# Altium PCB OK335xD V2.4 20160121.PcbDoc (part 1 of 4)
Units mm, origin at the board's own origin, x right, y up, seen from the top; angles counter-clockwise.
Board outline 190 x 130 mm, 4 copper layers (Top Layer, GND, POWER, Bottom Layer); 326 components, 332 nets, 1399 pads, 799 vias.
Unrouted connection lines stored in the file: 413.
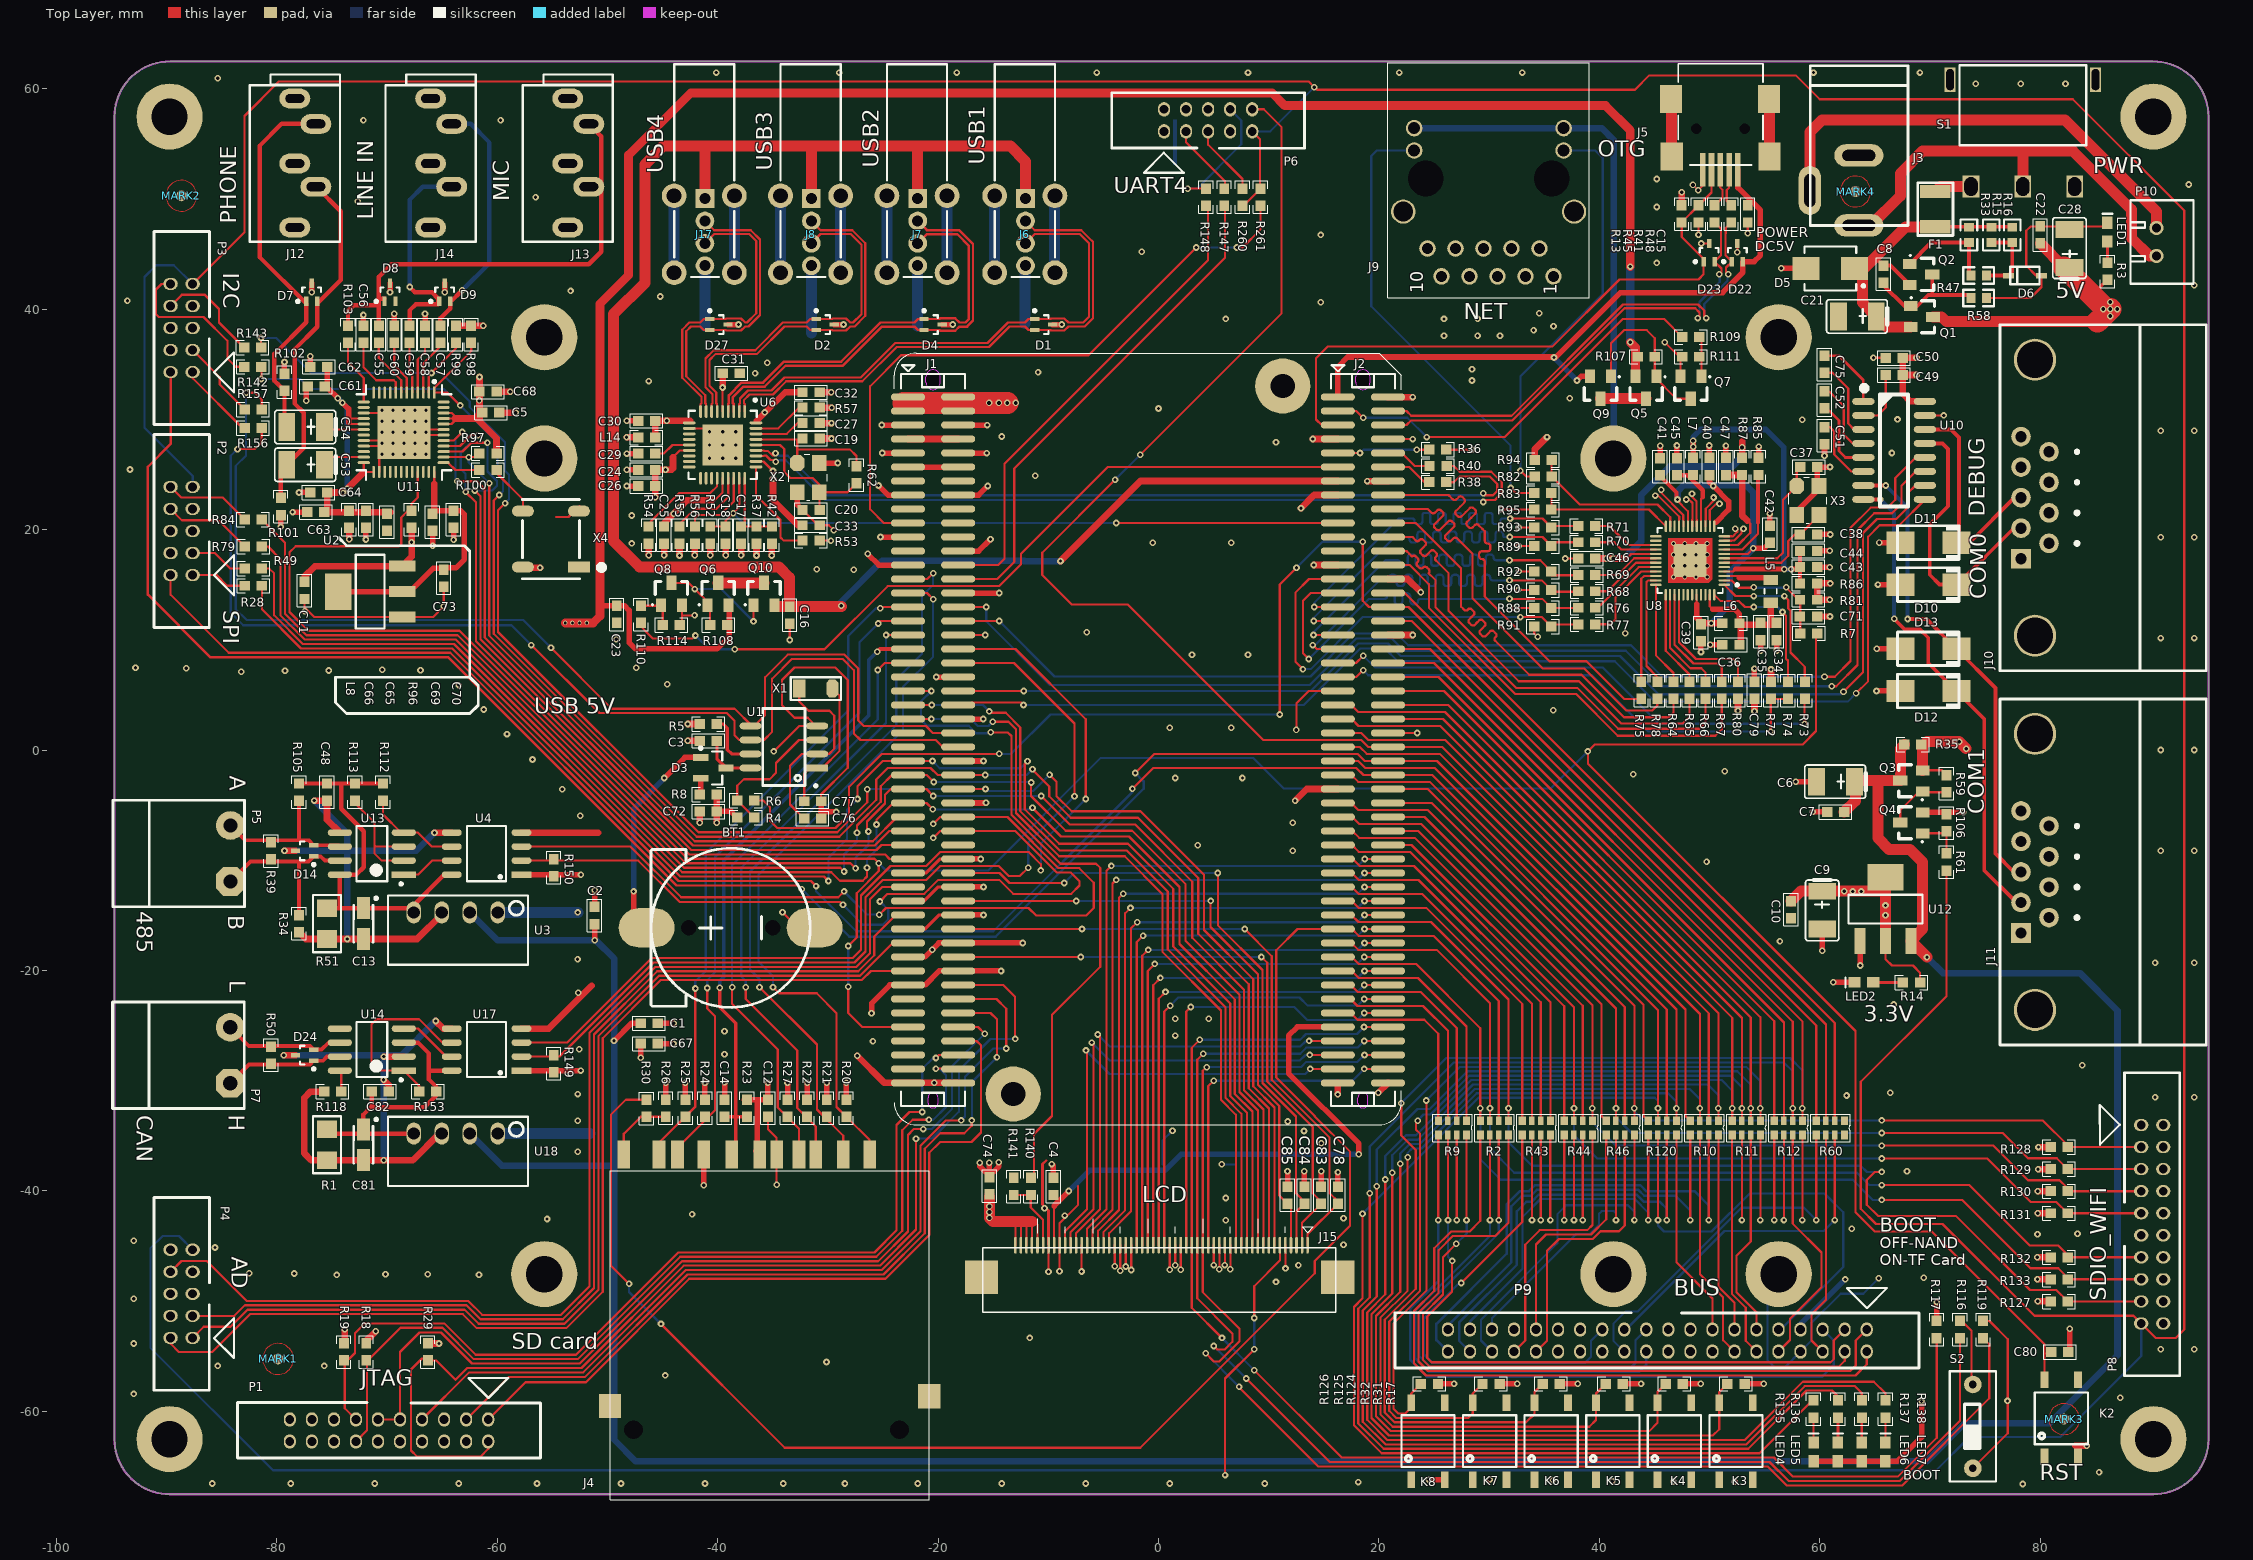
[diagram p0: Top Layer view]
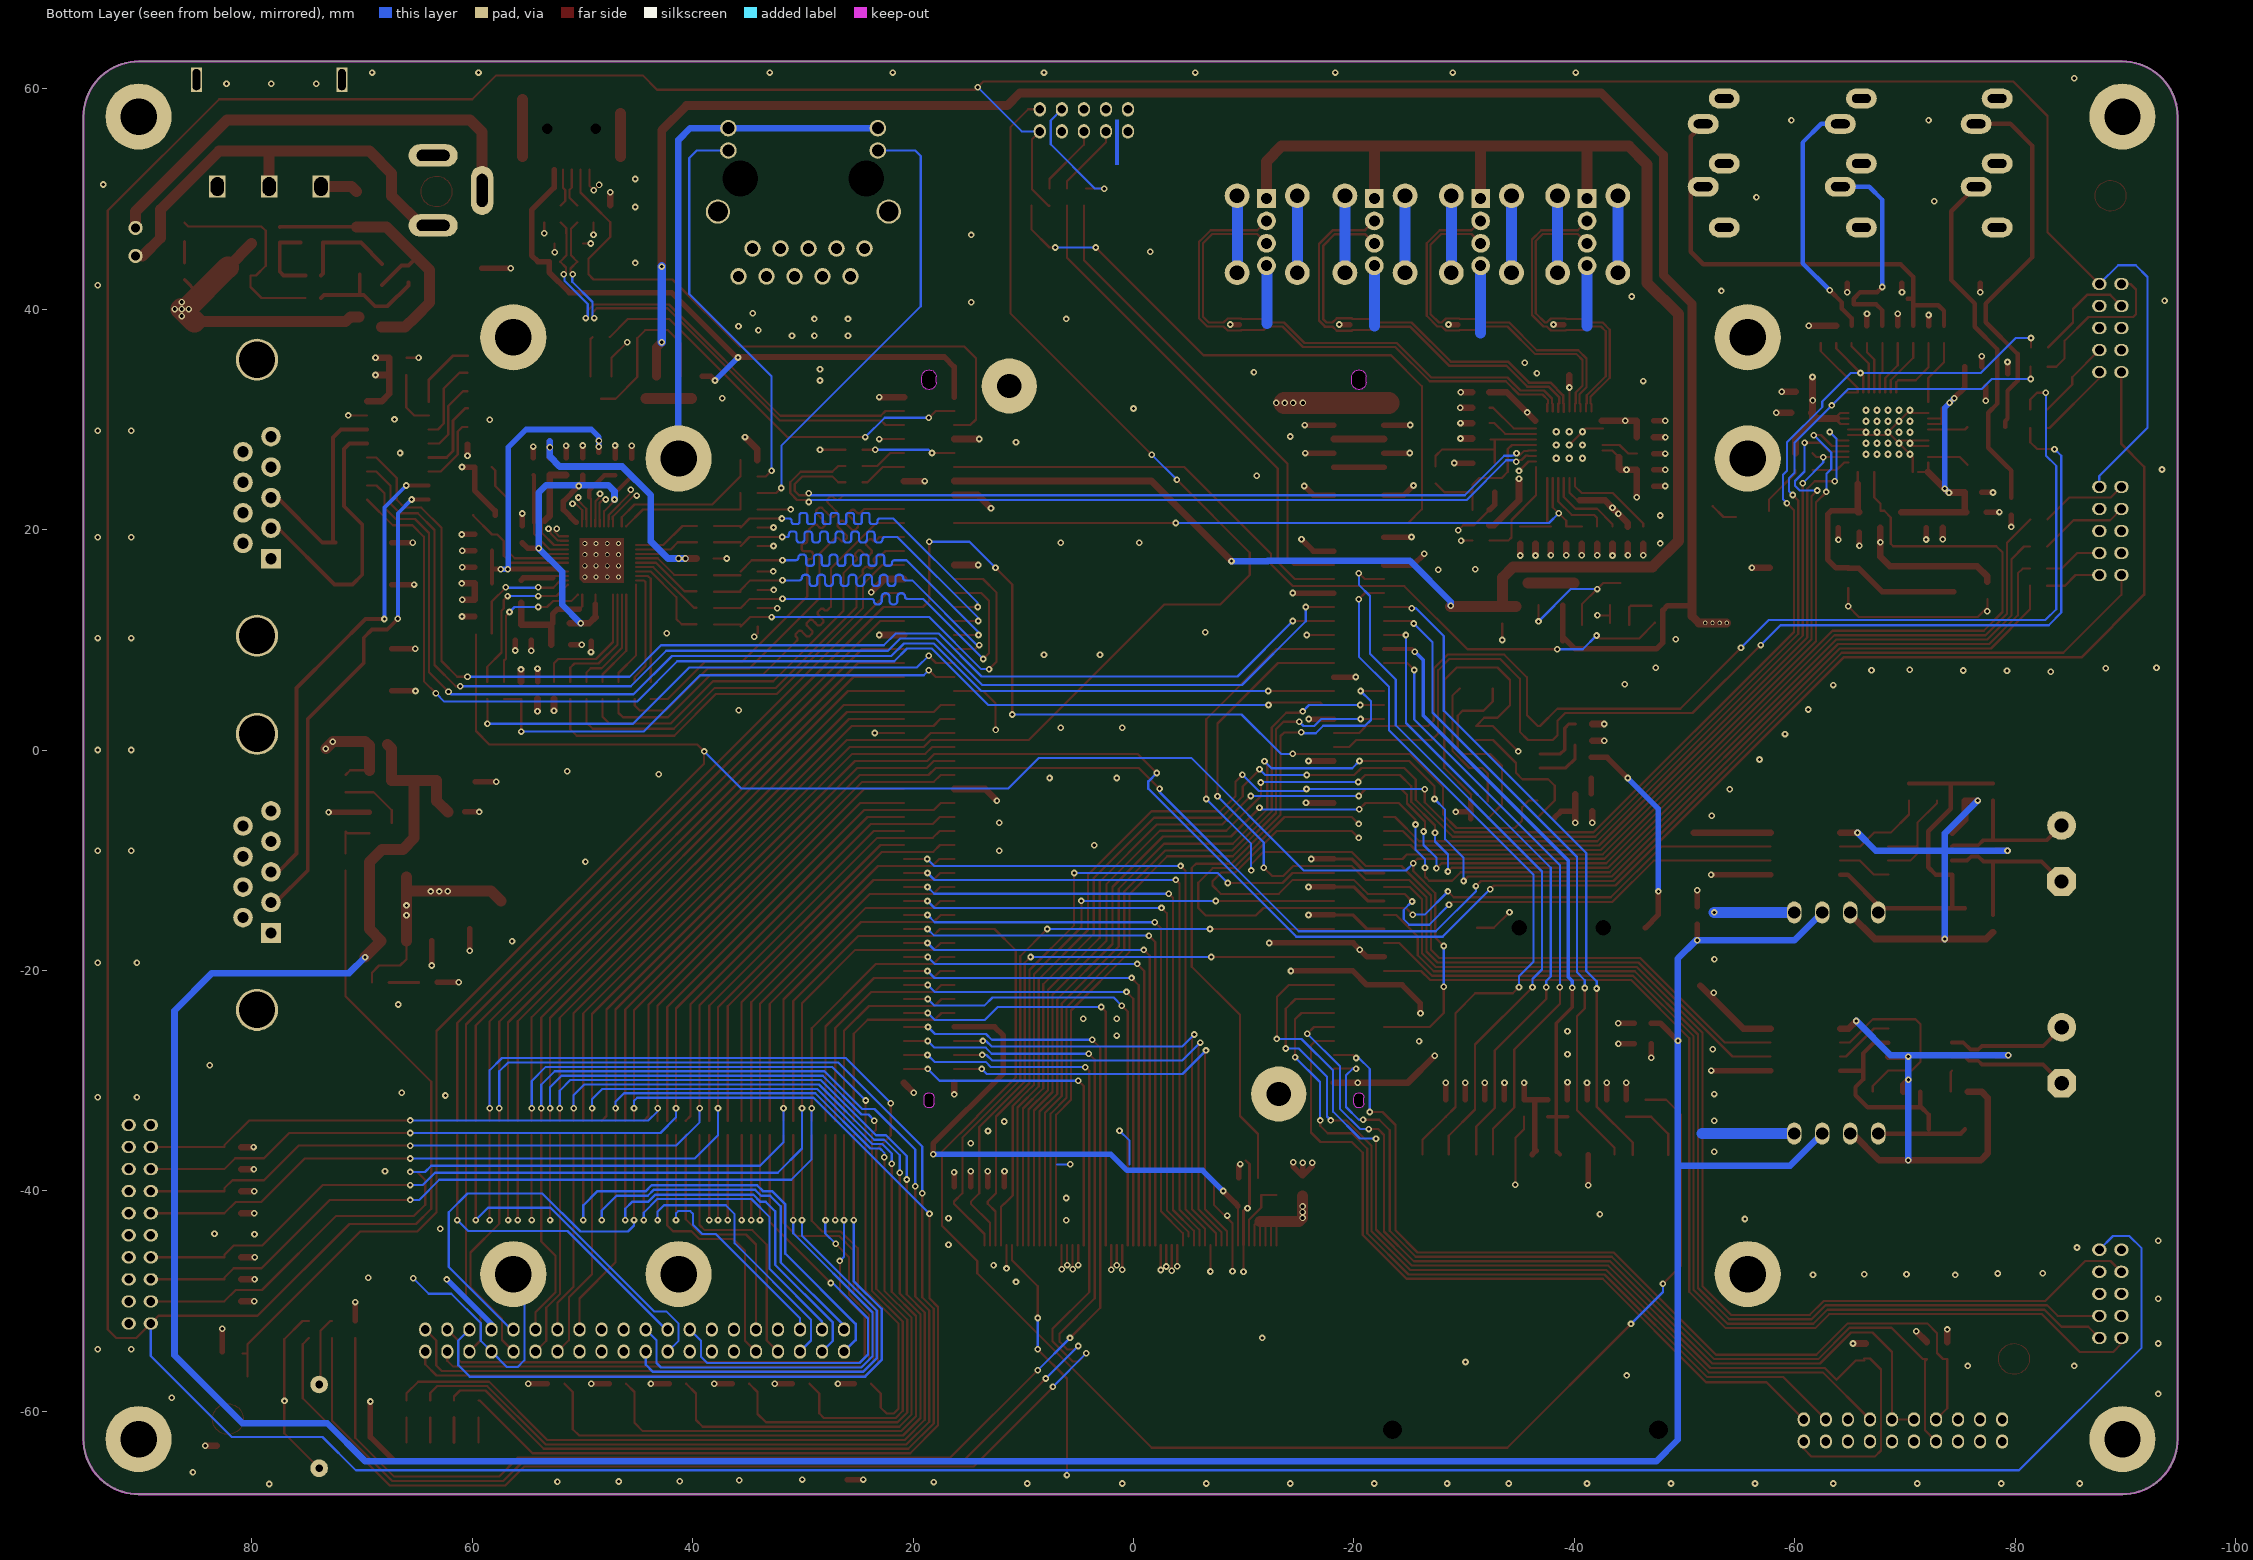
[diagram p1: Bottom Layer view, seen from below]
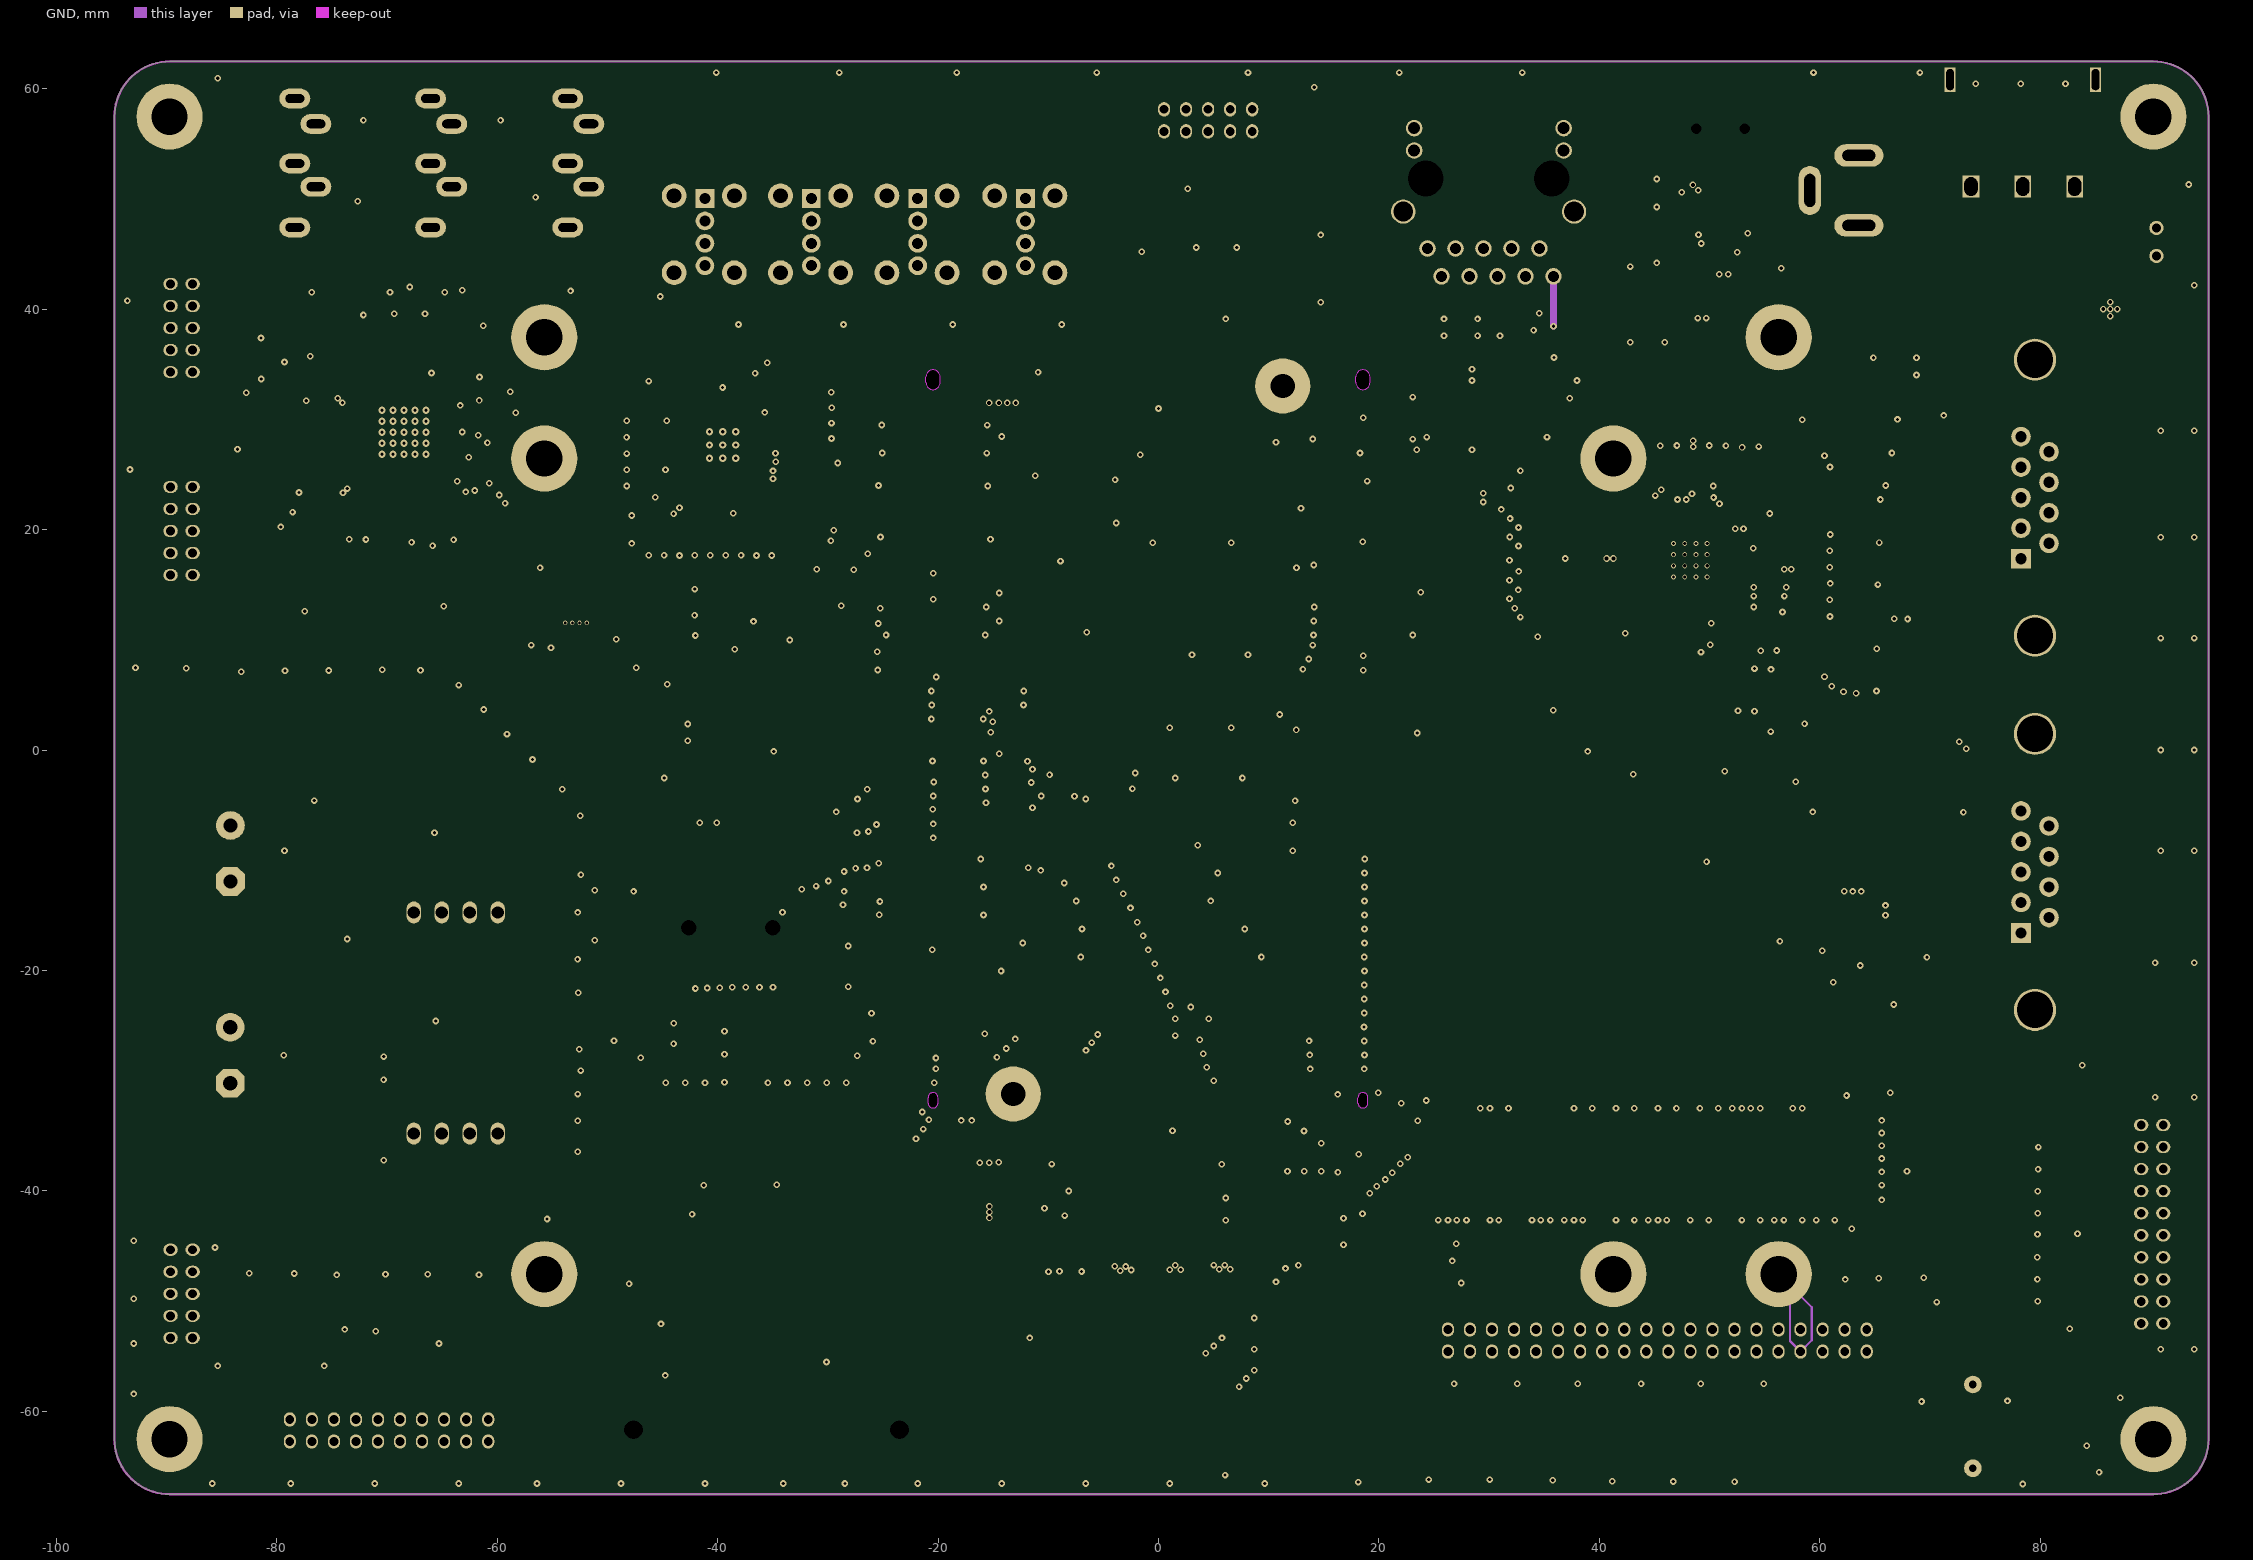
[diagram p2: GND]
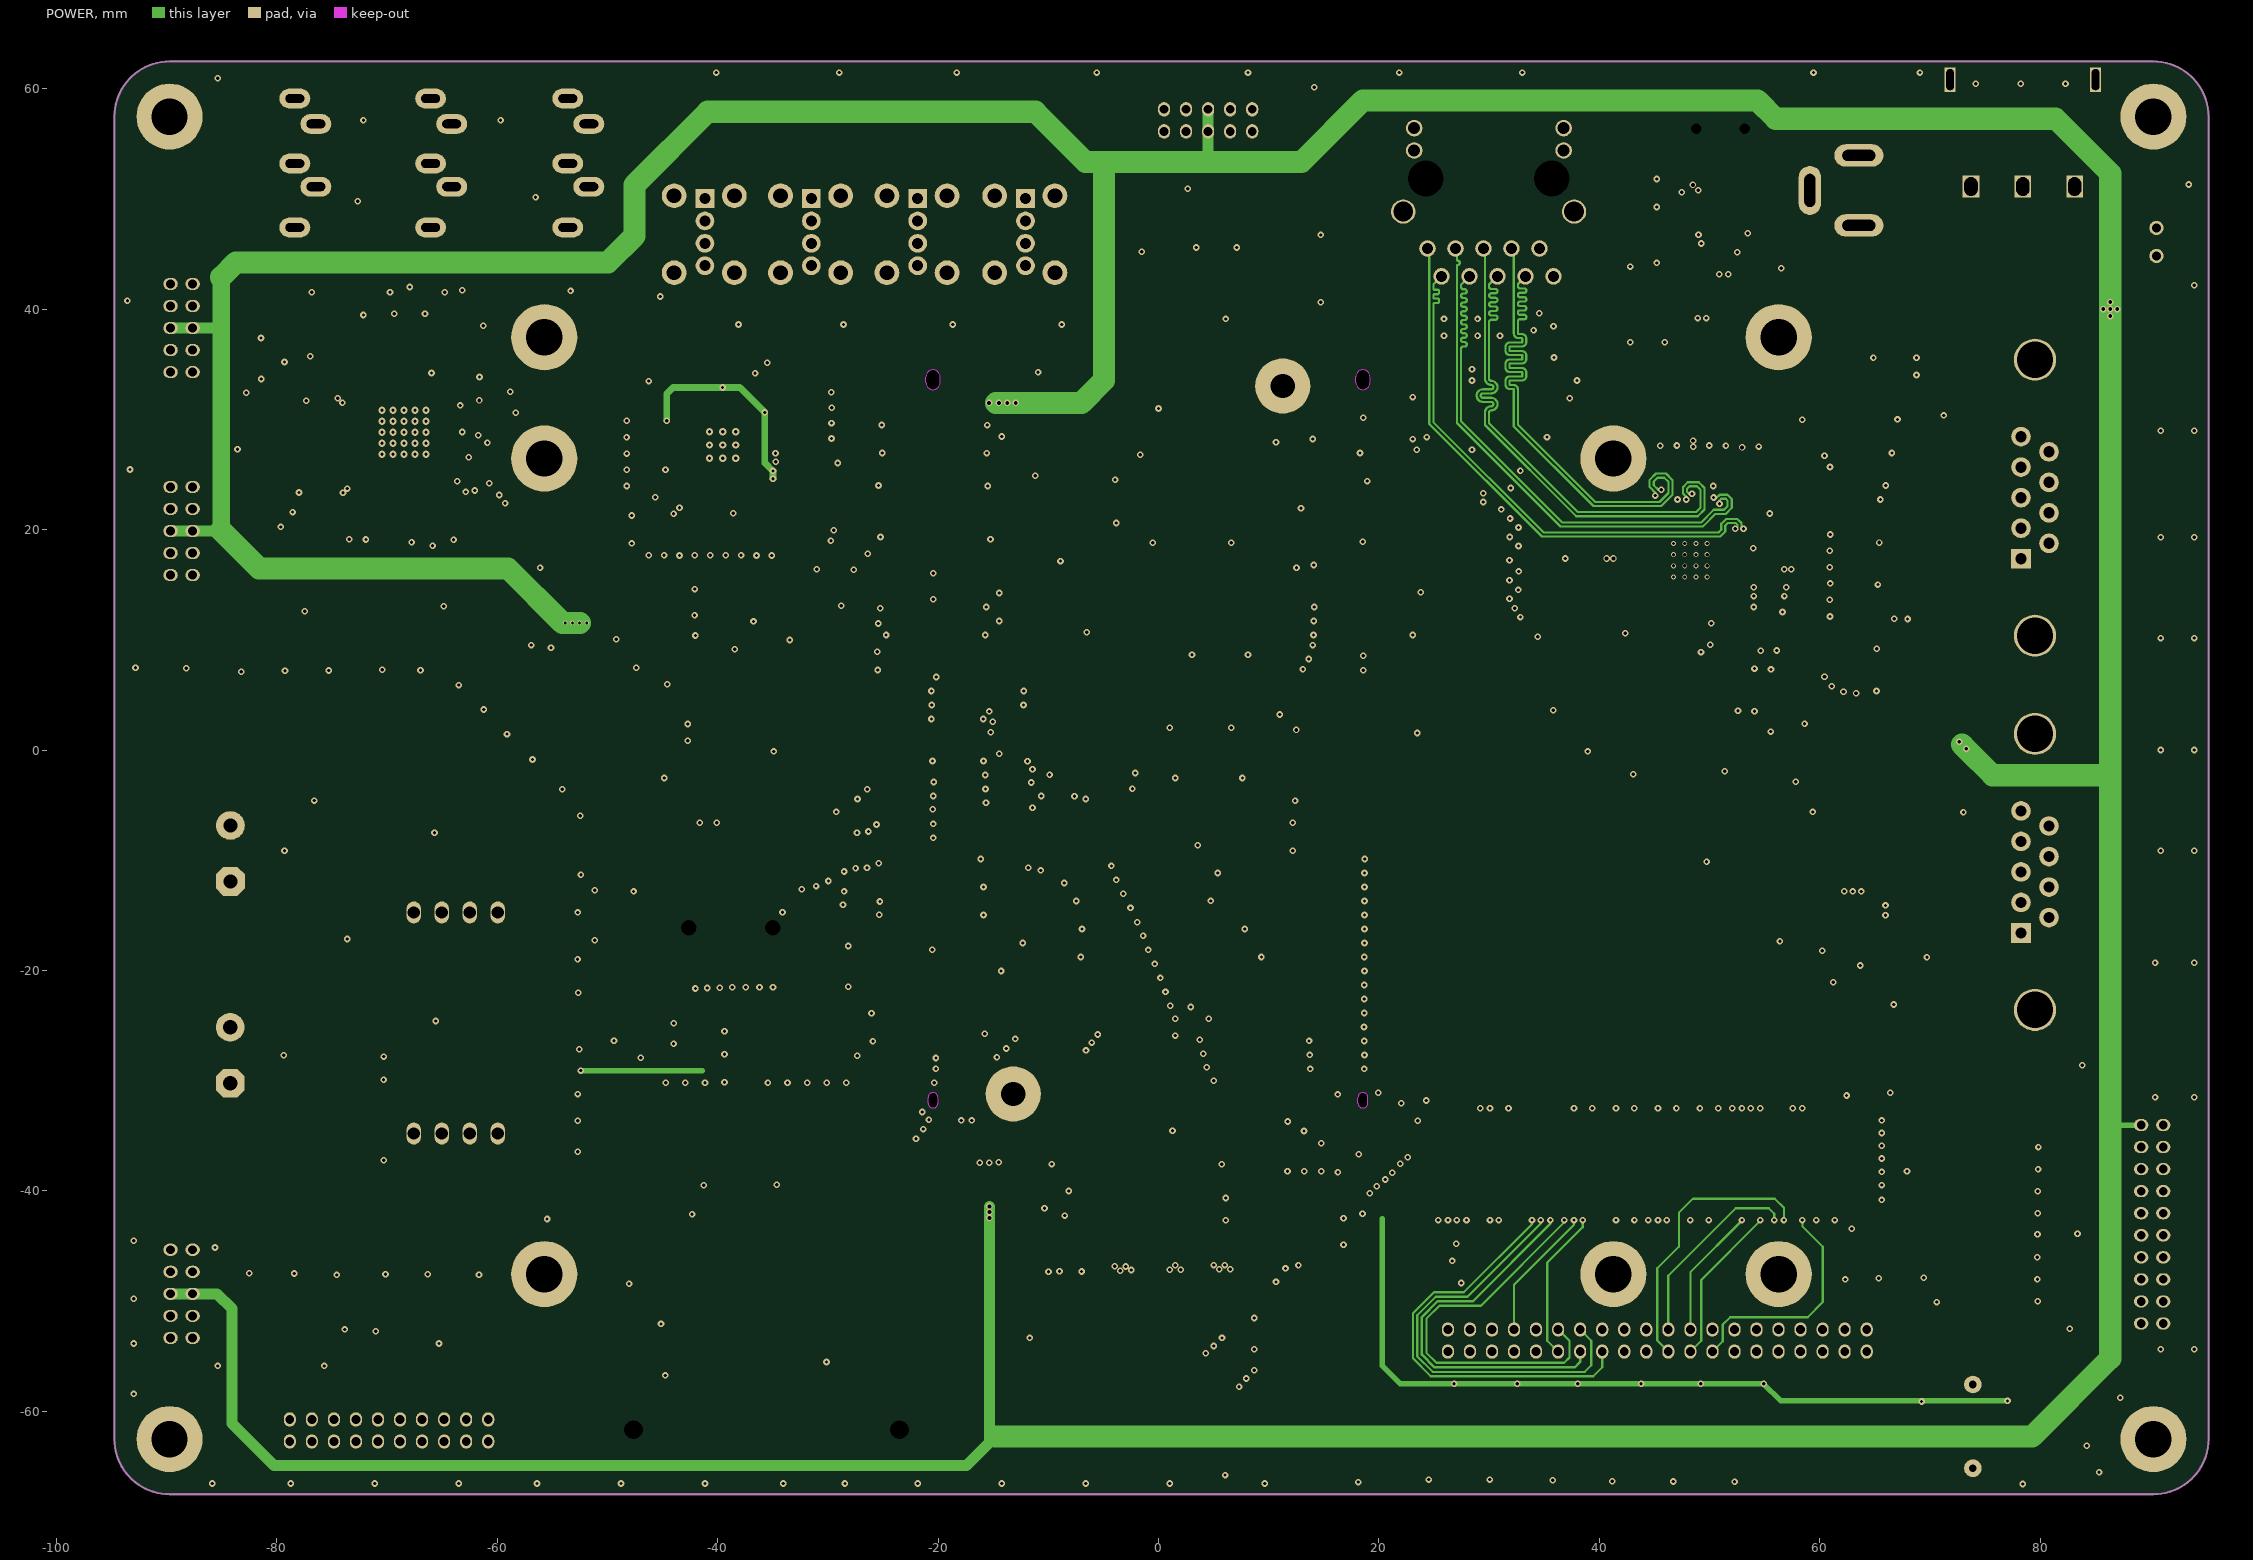
[diagram p3: POWER]

## Layer stack, top to bottom
Top Layer: signal copper 0.0356
Dielectric: core 0.32, FR-4, Dk 4.8
GND: signal copper 0.0356
Dielectric: prepreg 0.32, FR-4, Dk 4.8
POWER: signal copper 0.0356
Dielectric: core 0.32, FR-4, Dk 4.8
Bottom Layer: signal copper 0.0356

## Board outline
-94.725,-62.525 -94.725,57.475 cw(c-89.725,57.475) -89.725,62.475 90.275,62.475 cw(c90.275,57.475) 95.275,57.475 95.275,-62.525 cw(c90.275,-62.525) 90.275,-67.525 -89.725,-67.525 cw(c-89.725,-62.525)

## Design rules (kind name [scope] priority, off if disabled: settings)
Clearance Clearance_2 [(InDifferentialPairClass('All Differential Pairs'))] p1: gap=0.15
Clearance Clearance_1 [InPolygon] p2: gap=0.35
Clearance [All] p3: gap=0.2
ComponentClearance [All] p1 off: gap=0.254 collisioncheckmode=3 verticalgap=0 showdistances=FALSE
DiffPairsRouting [All] p1: maxlimit=0.254 minlimit=0.15 mostfreqgap=0.254 toplayer_maxgap=0.15 toplayer_prefgap=0.15 midlayer1_mingap=0.254 midlayer2_mingap=0.254 bottomlayer_maxgap=0.15 bottomlayer_prefgap=0.15 maxuncoupledlength=12.7
FabricationTestpoint [(IsPad And (OnTopLayer Or OnBottomLayer))] p1: side=3 testpointundercomponent=TRUE minsize=1.016 maxsize=2.54 preferedsize=1.524 minholesize=0 maxholesize=1.016 preferedholesize=0.813 testpointgrid=0.025 allowsidetop=TRUE allowsidebottom=TRUE usegrid=TRUE gridtolerance=0
Height [All] p1 off: minheight=0 maxheight=25.4 prefheight=12.7
HoleToHoleClearance [All] p1: gap=0.15 allowstackedmicrovias=TRUE
MinimumSolderMaskSliver [All] p1: minsoldermaskwidth=0.15
PlaneClearance [All] p1: clearance=0.254
PlaneConnect [All] p1: planeconnectstyle=Direct reliefexpansion=0.508 reliefentries=4 reliefconductorwidth=0.254 reliefairgap=0.254
PolygonConnect [All] p1: connectstyle=Direct reliefconductorwidth=0.254 reliefentries=4 polygonreliefangle="90 Angle" airgapwidth=0.254
RoutingVias [All] p1: holewidth=0.3 width=0.6 viastyle="Through Hole" minholewidth=0.3 minwidth=0.6 maxholewidth=0.3 maxwidth=0.6
SMDToCorner [All] p1: distance=0
SMDToPlane [All] p1: distance=0
SilkToSilkClearance [All] p1 off: silktosilkclearance=0
SilkToSolderMaskClearance SilkscreenOverComponentPads [IsPad] p1 off: minsilkscreentomaskgap=0 clearancetoexposedcopper=TRUE
SolderMaskExpansion [All] p1: expansion=0.102
Width [All] p1: maxlimit=5 minlimit=0.2 preferedwidth=0.2
18 further rules are at their usual default settings.

## Classes and differential pairs
component class SDIO_WIFI: K3 K4 K5 K6 K7 K8 LED4 LED5 LED6 LED7 P8 R17 R31 R32 R124 R125 R126 R127 R128 R129 R130 R131 R132 R133 R135 R136 R137 R138
component class LCD: C4 C74 C78 C83 C84 C85 J15 P9 R2 R9 R10 R11 R12 R43 R44 R46 R60 R120 R140 R141
component class USB: C15 C16 C17 C18 C19 C20 C23 C24 C25 C26 C27 C29 C30 C31 C32 C33 D1 D2 D4 D22 D23 D27 J5 J6 J7 J8 J17 L14 Q5 Q6 Q7 Q8 Q9 Q10 R13 R36 R37 R38 R40 R41 R42 R45 R48 R52 R53 R54 R55 R56 R57 R62 R107 R108 R109 R110 R111 R114 U6 X2
component class SODIMM: J1 J2 R260 R261
component class "Power & SD": BT1 C3 C6 C7 C8 C9 C10 C11 C12 C14 C21 C22 C28 C76 C77 C80 D3 D5 D6 F1 J4 K2 LED1 LED2 MARK1 MARK2 MARK3 MARK4 P1 P10 Q1 Q2 Q3 Q4 R3 R4 R5 R6 R8 R14 R15 R16 R18 R19 R20 R21 R22 R23 R24 R25 R26 R27 R29 R30 R33 R35 R47 R58 R59 R61 R106 U1 U12 X1
component class "NET & UART": C34 C35 C36 C37 C38 C39 C40 C41 C42 C43 C44 C45 C46 C47 C49 C50 C51 C52 C71 C75 C79 D10 D11 D12 D13 J9 J10 J11 L5 L6 L7 R7 R64 R65 R66 R67 R68 R69 R70 R71 R72 R73 R74 R75 R76 R77 R78 R80 R81 R82 R83 R85 R86 R87 R88 R89 R90 R91 R92 R93 R94 R95 U8 U10 X3
component class Audio: C5 C53 C54 C55 C56 C57 C58 C59 C60 C61 C62 C63 C64 C65 C66 C68 C69 C70 C72 C73 D7 D8 D9 J12 J13 J14 L8 R96 R97 R98 R99 R100 R101 R102 R103 U2 U11 X4
component class "AD & i2C & SPI": C1 C2 C13 C48 C67 C81 C82 D14 D24 P2 P3 P4 P5 P6 P7 R1 R28 R34 R39 R49 R50 R51 R79 R84 R105 R112 R113 R116 R117 R118 R119 R142 R143 R147 R148 R149 R150 R153 R156 R157 S2 U3 U4 U13 U14 U17 U18
differential pair TXRXD: +TXRXD_P -TXRXD_N
differential pair TXRXC: +TXRXC_P -TXRXC_N
differential pair TXRXB: +TXRXB_P -TXRXB_N
differential pair TXRXA: +TXRXA_P -TXRXA_N
differential pair D0: +D0_P -D0_N
differential pair USB0: +USB0_P -USB0_N
differential pair USB1: +USB1_P -USB1_N
differential pair USBD1: +USBD1_P -USBD1_N
differential pair USBD2: +USBD2_P -USBD2_N
differential pair USBD3: +USBD3_P -USBD3_N
differential pair USBD4: +USBD4_P -USBD4_N
differential pair USBUP: +USBUP_P -USBUP_N

## Components (designator, comment, footprint, x,y, rotation, side; value= is the part's Value field where it differs from the comment)
BT1 "BH1220_SMD" "BH-1220 Battery" -46.431,-16.129 r180 top locked
C1 "C0603" C0603_M1608 -46.203,-24.79 r180 top
C2 "C0603" C0603_M1608 -51.156,-15.011 r270 top
C3 "100nF" C0603_M1608 -40.843,0.838 r180 top
C4 "22pF-NC" C0603_M1608 -9.525,-39.599 r270 top
C5 "10uF" C0603_M1608 -60.579,30.607 r0 top
C6 "22uF" C1210_M3225 61.341,-2.845 r180 top
C7 "100nF" C0603_M1608 61.443,-5.613 r180 top
C8 "100nF" C0603_M1608 65.786,43.18 r270 top
C9 "22uF" C1210_M3225 60.198,-14.605 r270 top
C10 "100nF" C0603_M1608 57.404,-14.478 r270 top
C11 "100nF" C0603_M1608 -77.47,14.478 r270 top
C12 "100nF" C0603_M1608 -35.433,-32.499 r270 top
C13 "Cap Pol3" TC3216A -72.136,-15.748 r270 top
C14 "22pF" C0603_M1608 -39.37,-32.499 r90 top
C15 "4.7uF" C0603_M1608 53.467,48.641 r270 top
C16 "4.7uF" C0603_M1608 -33.452,12.243 r270 top
C17 "100nF" C0603_M1608 -37.871,19.507 r270 top
C18 "100nF" C0603_M1608 -39.268,19.507 r90 top
C19 "18pF" C0603_M1608 -31.521,28.27 r180 top
C20 "18pF" C0603_M1608 -31.521,21.793 r0 top
C21 "22uF" C1210_M3225 63.322,39.37 r180 top
C22 "100nF" C0603_M1608 80.01,46.736 r90 top
C23 "100nF" C0603_M1608 -49.149,12.319 r90 top
C24 "100nF" C0603_M1608 -46.431,25.425 r180 top
C25 "100nF" C0603_M1608 -44.856,19.507 r270 top
C26 "4.7uF" C0603_M1608 -46.431,23.952 r180 top
C27 "1uF" C0603_M1608 -31.521,29.667 r0 top
C28 "100uF" C1210_M3225 82.677,45.593 r90 top
C29 "1uF" C0603_M1608 -46.431,26.899 r180 top
C30 "100nF" C0603_M1608 -46.431,29.87 r180 top
C31 "100nF" C0603_M1608 -38.76,34.188 r0 top
C32 "100nF" C0603_M1608 -31.521,32.461 r0 top
C33 "100nF" C0603_M1608 -31.521,20.396 r0 top
C34 "C0603" C0603_M1608 56.091,10.756 r90 top
C35 "C0603" C0603_M1608 54.641,10.756 r90 top
C36 "C0603" C0603_M1608 51.943,9.55 r0 top
C37 "C0603" C0603_M1608 59.004,25.679 r180 top
C38 "C0603" C0603_M1608 58.979,19.558 r180 top
C39 "C0603" C0603_M1608 49.225,10.643 r90 top
C40 "C0603" C0603_M1608 49.986,25.724 r270 top
C41 "C0603" C0603_M1608 45.516,25.718 r270 top
C42 "C0603" C0603_M1608 55.474,19.583 r270 top
C43 "C0603" C0603_M1608 58.985,16.597 r180 top
C44 "C0603" C0603_M1608 58.985,18.078 r180 top
C45 "C0603" C0603_M1608 47.041,25.718 r270 top
C46 "C0603" C0603_M1608 38.877,17.383 r0 top
C47 "C0603" C0603_M1608 51.486,25.724 r270 top
C48 "C0603" C0603_M1608 -75.438,-3.81 r90 top
C49 "1uF" C0603_M1608 66.756,34.03 r180 top
C50 "100nF" C0603_M1608 66.751,35.585 r180 top
C51 "1uF" C0603_M1608 60.431,28.526 r270 top
C52 "1uF" C0603_M1608 60.431,31.776 r270 top
C53 "22uF" C1210_M3225 -77.47,25.908 r180 top
C54 "22uF" C1210_M3225 -77.47,29.337 r180 top
C55 "470nF" C0603_M1608 -70.739,37.719 r90 top
C56 "470nF" C0603_M1608 -72.136,37.719 r90 top
C57 "470nF" C0603_M1608 -65.151,37.719 r90 top
C58 "470nF" C0603_M1608 -66.548,37.719 r90 top
C59 "470nF" C0603_M1608 -67.945,37.719 r90 top
C60 "470nF" C0603_M1608 -69.342,37.719 r90 top
C61 "10uF" C0603_M1608 -76.429,32.995 r180 top
C62 "100nF" C0603_M1608 -76.175,34.773 r180 top
C63 "10uF" C0603_M1608 -76.454,21.59 r180 top
C64 "100nF" C0603_M1608 -76.2,23.368 r180 top
C65 "10uF" C0603_M1608 -70.002,20.676 r270 top
C66 "100nF" C0603_M1608 -71.907,20.93 r270 top
C67 "C0603" C0603_M1608 -46.203,-26.645 r180 top
C68 "100nF" C0603_M1608 -60.833,32.512 r0 top
C69 "10uF" C0603_M1608 -65.862,20.676 r270 top
C70 "100nF" C0603_M1608 -63.957,20.93 r270 top
C71 "C0603" C0603_M1608 58.979,12.116 r180 top
C72 "4.7uF" C0603_M1608 -40.843,-5.563 r180 top
C73 "10uF" C0603_M1608 -64.851,15.59 r270 top
C74 "10uF" C0603_M1608 -15.342,-39.548 r90 top
C75 "1uF" C0603_M1608 60.427,35.001 r270 top
C76 "6.8pF-NC" C0603_M1608 -31.369,-6.223 r180 top
C77 "6.8pF-NC" C0603_M1608 -31.369,-4.648 r180 top
C78 "0.01uF" C0603_M1608 16.281,-40.386 r90 top
C79 "C0603" C0603_M1608 54.077,5.436 r270 top
C80 "C0603" C0603_M1608 81.788,-54.61 r180 top
C81 "Cap Pol3" TC3216A -72.136,-35.814 r270 top
C82 "C0603" C0603_M1608 -70.612,-30.988 r180 top
C83 "0.01uF" C0603_M1608 14.757,-40.386 r90 top
C84 "0.01uF" C0603_M1608 13.233,-40.386 r90 top
C85 "0.01uF" C0603_M1608 11.709,-40.386 r90 top
D1 "LCTVS" SOT-523 -10.414,38.608 r0 top
D2 "LCTVS" SOT-523 -30.226,38.608 r0 top
D3 "BAT54C" SOT23-3D-C95P280X100 -40.386,-1.626 r0 top
D4 "LCTVS" SOT-523 -20.447,38.608 r0 top
D5 "SR54" SMB/DO-214AA 60.96,43.688 r180 top
D6 "MMSZ5231B" SOD123 78.613,43.053 r0 top
D7 "LCTVS" SOT-523 -76.835,41.529 r90 top
D8 "LCTVS" SOT-523 -69.723,41.529 r90 top
D9 "LCTVS" SOT-523 -64.77,41.529 r90 top
D10 "SMBJ15CA DO-214AA" DIODE-SK34A 67.31,15.011 r0 top
D11 "SMBJ15CA DO-214AA" DIODE-SK34A 67.31,18.821 r0 top
D12 "SMBJ15CA DO-214AA" DIODE-SK34A 67.31,5.359 r0 top
D13 "SMBJ15CA DO-214AA" DIODE-SK34A 67.31,9.195 r0 top
D14 "LCTVS" SOT-523 -77.47,-9.144 r180 top
D22 "LCTVS" SOT-523 52.527,45.136 r90 top
D23 "LCTVS" SOT-523 49.962,45.136 r90 top
D24 "LCTVS" SOT-523 -77.47,-27.686 r180 top
D27 "LCTVS" SOT-523 -39.878,38.608 r0 top
F1 "Fuse 2" R_1210 70.485,49.073 r270 top
J1 "FET335xD_V2.1_J1" "1.27MM SMT CONNECT PIN" -20.425,3.453 r270 top locked
J2 "FET335xD_V2.1_J2" "1.27MM SMT CONNECT PIN" 18.575,3.453 r270 top
J3 "PWR2.5" JACK-2.5MM_B 63.55,47.6 r0 top
J4 "SDCARD_KMSD18" SDcard_KDMS18 -48.514,-36.703 r0 top locked
J5 "miniUSB" MiniUSB 50.975,52.655 r90 top
J6 "USB-B" USB-C -12.065,44.196 r90 top
J7 "USB-B" USB-C -21.844,44.196 r90 top
J8 "USB-B" USB-C -31.496,44.196 r90 top
J9 "RJ45_Gigabit" RG45_Gagabit 29.49,45.507 r90 top
J10 "D Connector 9" DB9/M 78.26,22.897 r270 top
J11 "D Connector 9" DB9/M 78.26,-11.06 r270 top
J12 "3.5mm SJ3524" "3.5mm SJ3524" -78.359,53.213 r0 top
J13 "3.5mm SJ3524" "3.5mm SJ3524" -53.594,53.213 r0 top
J14 "3.5mm SJ3524" "3.5mm SJ3524" -66.04,53.213 r0 top
J15 "LCD" FPC54 0.075,-48.075 r0 top locked
J17 "USB-B" USB-C -41.148,44.196 r90 top
K2 "KEY 4.5X4.5X3" SWPB-4 82.042,-60.706 r0 top
K3 "KEY 4.5X4.5X3" SWPB-4 52.527,-62.763 r0 top
K4 "KEY 4.5X4.5X3" SWPB-4 46.939,-62.763 r0 top
K5 "KEY 4.5X4.5X3" SWPB-4 41.351,-62.763 r0 top
K6 "KEY 4.5X4.5X3" SWPB-4 35.763,-62.763 r0 top
K7 "KEY 4.5X4.5X3" SWPB-4 30.175,-62.763 r0 top
K8 "KEY 4.5X4.5X3" SWPB-4 24.587,-62.763 r0 top
L5 "4.7uH" L0805 55.55,14.402 r270 top
L6 "150R@100Mhz" L0603_M1608 51.943,11.506 r180 top
L7 "150R@100Mhz" L0603_M1608 48.514,25.73 r90 top
L8 "150R@100MHz" L0603_M1608 -73.431,20.93 r270 top
L14 "150R@100MHz" L0603_M1608 -46.431,28.372 r0 top
LED1 "LED BLUE" LED0603_M1608 86.106,46.99 r90 top
LED2 "LED BLUE" LED0603_M1608 64.008,-21.082 r180 top
LED4 "LED BLUE" LED0603_M1608 59.436,-63.678 r90 top
LED5 "LED BLUE" LED0603_M1608 61.646,-63.678 r90 top
LED6 "LED BLUE" LED0603_M1608 63.824,-63.676 r90 top
LED7 "LED BLUE" LED0603_M1608 65.964,-63.678 r90 top
MARK1 "MARK" MARK -79.883,-55.245 r90 top
MARK2 "MARK" MARK -88.646,50.292 r90 top
MARK3 "MARK" MARK 82.169,-60.706 r90 top
MARK4 "MARK" MARK 63.246,50.673 r90 top
P1 "JTAG" IDC20S -60.803,-60.761 r180 top
P2 "I2C" IDC10S -87.63,15.875 r90 top
P3 "I2C" IDC10S -87.63,34.29 r90 top
P4 "I2C" IDC10S -87.63,-53.34 r90 top
P5 "CAN" 2EDGKA-5.08-2P -84.201,-9.383 r90 top
P6 "I2C" IDC10S 0.508,56.134 r0 top
P7 "CAN" 2EDGKA-5.08-2P -84.226,-27.697 r90 top
P8 "JTAG" IDC20S 89.189,-34.015 r270 top
P9 "BUS" IDC40S 64.262,-52.578 r180 top locked
P10 "CAN" HX2.54_2P 90.551,46.101 r90 top
Q1 "AO3415-SOT-23-3" SOT23 69.266,39.319 r0 top
Q2 "S9015" SOT23 69.19,43.155 r0 top
Q3 "AO3415-SOT-23-3" SOT23 68.326,-2.794 r180 top
Q4 "S9013-SOT23-NC" SOT23 68.326,-6.604 r180 top
Q5 "AO3415-SOT-23-3" SOT23 44.247,32.893 r270 top
Q6 "AO3415-SOT-23-3" SOT23 -39.954,14.148 r90 top
Q7 "S9013-SOT23" SOT23 48.311,32.893 r270 top
Q8 "S9013-SOT23" SOT23 -44.196,14.148 r90 top
Q9 "AO3415-SOT-23-3" SOT23 40.107,32.893 r270 top
Q10 "AO3415-SOT-23-3" SOT23 -35.789,14.148 r90 top
R1 "R1808" 1206 -75.438,-35.814 r270 top
R2 "22R" R0603-8P4R 30.48,-34.29 r180 top
R3 "2.2K" R0603_M1608 86.106,43.434 r270 top
R4 "10K" R0603_M1608 -37.44,-6.121 r0 top
R5 "10K" R0603_M1608 -40.843,2.362 r0 top
R6 "0R" R0603_M1608 -37.44,-4.572 r0 top
R7 "R0603" R0603_M1608 59.004,10.592 r0 top
R8 "2.2K" R0603_M1608 -40.843,-4.039 r0 top
R9 "22R" R0603-8P4R 26.67,-34.29 r180 top
R10 "22R" R0603-8P4R 49.53,-34.29 r180 top
R11 "22R" R0603-8P4R 53.34,-34.29 r180 top
R12 "22R" R0603-8P4R 57.15,-34.29 r180 top
R13 "10K" R0603_M1608 47.473,48.641 r270 top
R14 "2.2K" R0603_M1608 68.326,-21.082 r0 top
R15 "Res3" 0603 75.565,46.736 r270 top
R16 "Res3" 0603 77.47,46.736 r270 top
R17 "1K" R0603_M1608 52.4,-57.506 r180 top
R18 "4.7K" R0603_M1608 -71.882,-54.61 r270 top
R19 "4.7K" R0603_M1608 -73.914,-54.61 r270 top
R20 "10K" R0603_M1608 -28.321,-32.499 r270 top
R21 "10K" R0603_M1608 -30.099,-32.499 r270 top
R22 "10K" R0603_M1608 -31.877,-32.499 r270 top
R23 "10K" R0603_M1608 -37.338,-32.487 r270 top
R24 "10K" R0603_M1608 -41.148,-32.499 r270 top
R25 "10K" R0603_M1608 -42.926,-32.499 r270 top
R26 "10K" R0603_M1608 -44.704,-32.499 r270 top
R27 "10K" R0603_M1608 -33.655,-32.499 r270 top
R28 "R0603" R0603_M1608 -82.118,14.91 r0 top
R29 "4.7K" R0603_M1608 -66.294,-54.61 r90 top
R30 "0R" R0603_M1608 -46.457,-32.512 r90 top
R31 "1K" R0603_M1608 46.812,-57.506 r180 top
R32 "1K" R0603_M1608 41.351,-57.506 r180 top
R33 "Res3" 0603 73.533,46.736 r270 top
R34 "R0603" R0603_M1608 -77.978,-15.748 r90 top
R35 "0R" R0603_M1608 68.453,0.508 r0 top
R36 "0R" R0603_M1608 25.349,27.254 r180 top
R37 "33K" R0603_M1608 -36.474,19.507 r270 top
R38 "0R" R0603_M1608 25.349,24.304 r180 top
R39 "R0603" R0603_M1608 -80.518,-9.144 r270 top
R40 "0R" R0603_M1608 25.366,25.779 r180 top
R41 "22R" R0603_M1608 50.47,48.641 r90 top
R42 "100K" R0603_M1608 -35.077,19.507 r90 top
R43 "22R" R0603-8P4R 34.29,-34.29 r180 top
R44 "22R" R0603-8P4R 38.1,-34.29 r180 top
R45 "120K" R0603_M1608 48.997,48.641 r90 top
R46 "22R" R0603-8P4R 41.91,-34.29 r180 top
R47 "Res3" 0603 74.422,43.053 r180 top
R48 "22R" R0603_M1608 51.968,48.641 r90 top
R49 "R0603" R0603_M1608 -82.118,16.459 r0 top
R50 "R0603" R0603_M1608 -80.518,-27.686 r90 top
R51 "R1808" 1206 -75.438,-15.748 r270 top
R52 "100K" R0603_M1608 -40.665,19.507 r270 top
R53 "100K" R0603_M1608 -31.521,18.999 r180 top
R54 "100K" R0603_M1608 -46.253,19.507 r270 top
R55 "100K" R0603_M1608 -43.459,19.507 r270 top
R56 "100K" R0603_M1608 -42.062,19.507 r270 top
R57 "12K" R0603_M1608 -31.521,31.064 r0 top
R58 "Res3" 0603 74.422,41.021 r0 top
R59 "10K-NC" R0603_M1608 71.501,-3.048 r90 top
R60 "22R" R0603-8P4R 60.96,-34.29 r180 top
R61 "10K-NC" R0603_M1608 71.501,-10.16 r270 top
R62 "1M" R0603_M1608 -27.407,24.968 r90 top
R64 "22R" R0603_M1608 46.725,5.417 r270 top
R65 "22R" R0603_M1608 48.185,5.417 r270 top
R66 "22R" R0603_M1608 49.645,5.417 r270 top
R67 "22R" R0603_M1608 51.105,5.417 r270 top
R68 "22R" R0603_M1608 38.877,14.408 r180 top
R69 "22R" R0603_M1608 38.877,15.891 r180 top
R70 "22R" R0603_M1608 38.852,18.849 r180 top
R71 "22R" R0603_M1608 38.852,20.333 r180 top
R72 "2.2K" R0603_M1608 55.574,5.417 r270 top
R73 "22R" R0603_M1608 58.649,5.417 r270 top
R74 "22R" R0603_M1608 57.111,5.417 r270 top
R75 "22R" R0603_M1608 43.805,5.417 r270 top
R76 "22R" R0603_M1608 38.877,12.908 r180 top
R77 "22R" R0603_M1608 38.877,11.408 r180 top
R78 "22R" R0603_M1608 45.265,5.417 r270 top
R79 "R0603" R0603_M1608 -82.118,18.466 r180 top
R80 "10K" R0603_M1608 52.58,5.417 r270 top
R81 "100K" R0603_M1608 58.985,13.634 r0 top
R82 "330R" R0603_M1608 34.9,24.816 r180 top
R83 "330R" R0603_M1608 34.874,23.317 r180 top
R84 "R0603" R0603_M1608 -82.144,20.93 r180 top
R85 "2.37K" R0603_M1608 54.458,25.73 r90 top
R86 "0R" R0603_M1608 58.985,15.116 r0 top
R87 "0R" R0603_M1608 52.959,25.73 r270 top
R88 "10K" R0603_M1608 34.878,12.874 r0 top
R89 "10K" R0603_M1608 34.874,18.517 r0 top
R90 "10K" R0603_M1608 34.874,14.529 r0 top
R91 "10K" R0603_M1608 34.874,11.201 r0 top
R92 "10K" R0603_M1608 34.874,16.205 r0 top
R93 "10K" R0603_M1608 34.874,20.193 r0 top
R94 "10K" R0603_M1608 34.9,26.314 r0 top
R95 "10K" R0603_M1608 34.878,21.832 r0 top
R96 "10K_NC" R0603_M1608 -67.767,20.93 r270 top
R97 "100K" R0603_M1608 -60.833,26.924 r0 top
R98 "4.7K" R0603_M1608 -62.357,37.719 r90 top
R99 "4.7K" R0603_M1608 -63.754,37.719 r90 top
R100 "0R" R0603_M1608 -60.833,25.4 r0 top
R101 "10K" R0603_M1608 -79.629,22.098 r90 top
R102 "10K" R0603_M1608 -79.299,33.376 r270 top
R103 "2.2K" R0603_M1608 -73.533,37.719 r270 top
R105 "R0603" R0603_M1608 -77.978,-3.81 r270 top
R106 "10K-NC" R0603_M1608 71.501,-6.604 r90 top
R107 "10K" R0603_M1608 44.247,35.687 r180 top
R108 "10K" R0603_M1608 -39.903,11.354 r0 top
R109 "10K" R0603_M1608 48.311,37.465 r180 top
R110 "10K" R0603_M1608 -46.965,12.319 r270 top
R111 "10K" R0603_M1608 48.311,35.687 r180 top
R112 "R0603" R0603_M1608 -70.358,-3.81 r270 top
R113 "R0603" R0603_M1608 -72.898,-3.81 r270 top
R114 "10K" R0603_M1608 -44.196,11.354 r0 top
R116 "10K" R0603_M1608 72.72,-52.578 r90 top
R117 "10K" R0603_M1608 70.612,-52.578 r90 top
R118 "4.7K" R0603_M1608 -74.93,-30.988 r0 top
R119 "10K" R0603_M1608 74.828,-52.578 r90 top
R120 "22R" R0603-8P4R 45.72,-34.29 r180 top
R124 "1K" R0603_M1608 35.636,-57.506 r180 top
R125 "1K" R0603_M1608 30.175,-57.506 r180 top
R126 "1K" R0603_M1608 24.587,-57.506 r180 top
R127 "4.7K" R0603_M1608 81.714,-50.025 r0 top
R128 "10K" R0603_M1608 81.714,-36.025 r0 top
R129 "10K" R0603_M1608 81.714,-38.025 r0 top
R130 "10K" R0603_M1608 81.714,-40.025 r0 top
R131 "10K" R0603_M1608 81.714,-42.025 r0 top
R132 "10K" R0603_M1608 81.714,-46.025 r0 top
R133 "10K" R0603_M1608 81.714,-48.025 r0 top
R135 "1K" R0603_M1608 59.43,-59.787 r90 top
R136 "1K" R0603_M1608 61.648,-59.787 r90 top
R137 "1K" R0603_M1608 63.816,-59.787 r90 top
R138 "1K" R0603_M1608 65.958,-59.787 r90 top
R140 "22R" R0603_M1608 -11.582,-39.599 r270 top
R141 "4.7K" R0603_M1608 -13.132,-39.599 r270 top
R142 "R0603" R0603_M1608 -82.169,34.773 r180 top
R143 "R0603" R0603_M1608 -82.194,36.525 r180 top
R147 "R0603" R0603_M1608 5.969,50.165 r90 top
R148 "R0603" R0603_M1608 4.318,50.165 r270 top
R149 "R0603" R0603_M1608 -54.864,-28.448 r90 top
R150 "R0603" R0603_M1608 -54.864,-10.668 r90 top
R153 "R0603" R0603_M1608 -66.294,-30.988 r180 top
R156 "R0603" R0603_M1608 -82.144,29.21 r0 top
R157 "R0603" R0603_M1608 -82.144,30.912 r0 top
R260 "R0603" R0603_M1608 7.62,50.165 r270 top
R261 "R0603" R0603_M1608 9.271,50.165 r270 top
S1 "CON3" POWER_switch 78.425,51.125 r90 top
S2 "BOOT" SWITCH_1P 73.889,-61.366 r0 top
U1 "RX8010SJ" "SOP-8 - RX8010SJ" -33.985,0.279 r180 top
U2 "LM1117" LM1117 -71.628,14.478 r90 top
U3 "DC-DC-F0505-1WR2" CF0505-1WR2 -63.754,-14.732 r180 top
U4 "ADUM1201AR" "SO8_N - ADUM1201" -60.96,-9.398 r180 top
U6 "USB2514QFN36" QFN36(USB251x) -39.542,27.684 r270 top
U8 "AR8031" QFN48C40P600X600_AR8031 48.235,17.196 r180 top
U10 "MAX3232E" SOIC-16N 66.756,27.23 r0 top
U11 "TLV320AIC3106" QFN48(TLV320) -68.453,28.829 r270 top
U12 "LM1117" LM1117 66.065,-14.326 r0 top
U13 "MAX485E" SOIC-8N -71.374,-9.398 r180 top
U14 "MCP2551" SOIC-8N -71.374,-27.178 r180 top
U17 "ADUM1201AR" "SO8_N - ADUM1201" -60.96,-27.178 r180 top
U18 "DC-DC-F0505-1WR2" CF0505-1WR2 -63.754,-34.798 r180 top
X1 "32.768K-NC" CRYSTALS_3215_2PIN -31.09,5.588 r180 top
X2 "24MHz" Crystals_3225 -31.775,24.714 r0 top
X3 "25MHz" Crystals_3225 58.916,22.631 r0 top
X4 "12M" Y7050 -55.042,19.126 r270 top

## Footprints (in the part's own frame and the unit in brackets; to place one, negate y for a bottom-side part, rotate by r counter-clockwise, add the part's x,y. Pads: shape width x height; smd on the part's side, far side on the other; paste and mask are expansions set on the pad)
"1.27MM SMT CONNECT PIN" [mm]
  round 0 hole 1.3 slot 1.8 at 0 deg unplated: 0(-30.147,-0.025)
  round 0 hole 0.9 slot 1.4 at 0 deg unplated: 0(35.233,-0.025)
  oval 0.65x3.1 smd: 1(-28.572,-2.3) 2(-28.572,2.25) 3(-27.302,-2.3) 4(-27.302,2.25) 5(-26.032,-2.3) 6(-26.032,2.25) 7(-24.762,-2.3) 8(-24.762,2.25) 9(-23.492,-2.3) 10(-23.492,2.25) 11(-22.222,-2.3) 12(-22.222,2.25) 13(-20.952,-2.3) 14(-20.952,2.25) 15(-19.682,-2.3) 16(-19.682,2.25) 17(-18.412,-2.3) 18(-18.412,2.25) 19(-17.142,-2.3) 20(-17.142,2.25) 21(-15.872,-2.3) 22(-15.872,2.25) 23(-14.602,-2.3) 24(-14.602,2.25) 25(-13.332,-2.3) 26(-13.332,2.25) 27(-12.062,-2.3) 28(-12.062,2.25) 29(-10.792,-2.3) 30(-10.792,2.25) 31(-9.522,-2.3) 32(-9.522,2.25) 33(-8.252,-2.3) 34(-8.252,2.25) 35(-6.982,-2.3) 36(-6.982,2.25) 37(-5.712,-2.3) 38(-5.712,2.25) 39(-4.442,-2.3) 40(-4.442,2.25) 41(-3.172,-2.3) 42(-3.172,2.25) 43(-1.902,-2.3) 44(-1.902,2.25) 45(-0.632,-2.3) 46(-0.632,2.25) 47(0.638,-2.3) 48(0.638,2.25) 49(1.908,-2.3) 50(1.908,2.25) 51(3.178,-2.3) 52(3.178,2.25) 53(4.448,-2.3) 54(4.448,2.25) 55(5.718,-2.3) 56(5.718,2.25) 57(6.988,-2.3) 58(6.988,2.25) 59(8.258,-2.3) 60(8.258,2.25) 61(9.528,-2.3) 62(9.528,2.25) 63(10.798,-2.3) 64(10.798,2.25) 65(12.068,-2.3) 66(12.068,2.25) 67(13.338,-2.3) 68(13.338,2.25) 69(14.608,-2.3) 70(14.608,2.25) 71(15.878,-2.3) 72(15.878,2.25) 73(17.148,-2.3) 74(17.148,2.25) 75(18.418,-2.3) 76(18.418,2.25) 77(19.688,-2.3) 78(19.688,2.25) 79(20.958,-2.3) 80(20.958,2.25) 81(22.228,-2.3) 82(22.228,2.25) 83(23.498,-2.3) 84(23.498,2.25) 85(24.768,-2.3) 86(24.768,2.25) 87(26.038,-2.3) 88(26.038,2.25) 89(27.308,-2.3) 90(27.308,2.25) 91(28.578,-2.3) 92(28.578,2.25) 93(29.848,-2.3) 94(29.848,2.25) 95(31.118,-2.3) 96(31.118,2.25) 97(32.388,-2.3) 98(32.388,2.25) 99(33.658,-2.3) 100(33.658,2.25)
  Keep-Out Layer lines w0: -29.897,-0.675 ccw(c-29.897,-0.025) -29.897,0.625 -30.397,0.625 ccw(c-30.397,-0.025) -30.397,-0.675 -29.897,-0.675 ; 35.483,-0.475 ccw(c35.483,-0.025) 35.483,0.425 34.983,0.425 ccw(c34.983,-0.025) 34.983,-0.475 35.483,-0.475
  silkscreen extent -31.46,-2.93 35.75,2.87
2EDGKA-5.08-2P [mm]
  oct 2.6x2.6 hole 1.3: 1(-2.54,0)
  round 2.6 hole 1.3: 2(2.54,0)
  silkscreen extent -4.83,-1.27 4.83,10.67
"3.5mm SJ3524" [mm]
  oval 2.8x1.8 hole 0.8 slot 1.7 at 0 deg mask+0.102: 1(0,-5.8) 2(1.91,3.6) 3(1.91,-2.1) 4(0,0) 5(0,5.9)
  silkscreen extent -4.09,-7.1 4.09,8.08
0603 [mm]
  rect 0.8x0.9 smd: 1(-0.7,0) 2(0.7,0)
  silkscreen extent -1.4,-0.75 1.4,0.75, body extent -0.93,-0.53 0.82,0.42, height 1.3
1206 [mm] "3216mm"
  rect 1.6x1.8 smd: 1(-1.4,0) 2(1.4,0)
  silkscreen extent -2.59,-1.27 2.59,1.27
"BH-1220 Battery" [mil]
  oval 200x140 smd: 1(0,0) 2(-600,0)
  round 0 hole 55.12 unplated: 3(-150,0) 4(-450,0)
  silkscreen extent -584,-284 -16,284
C0603_M1608 [mm] "Chip Capacitor, 2-Leads, Body 1.6x0.8mm, IPC Medium Density"
  rect 0.95x0.9 smd: 1(-0.775,0) 2(0.775,0)
  silkscreen extent -1.48,-0.65 1.48,0.65, body extent -0.85,-0.45 0.85,0.45, height 0.55
C1210_M3225 [mm]
  rect 1.524x2.524 smd: 1(-1.8,0.025) 2(1.629,0.025)
  silkscreen extent -2.82,-1.49 2.71,1.54
CF0505-1WR2 [mm]
  oval 1.3x2 hole 1.1: 1(-3.81,0) 2(-1.27,0) 4(1.27,0) 5(3.81,0)
  silkscreen extent -6.55,-1.52 6.15,4.75
CRYSTALS_3215_2PIN [mm] "Chip Capacitor, 2-Leads, Body 3.2x1.5mm, IPC Medium Density"
  oct 1.1x1.65 smd: 1(-1.5,0)
  rect 1.1x1.65 smd: 2(1.5,0)
  silkscreen extent -2.27,-1.02 2.27,1.05, body extent -1.6,-0.75 1.6,0.75, height 0.75
Crystals_3225 [mm]
  oct 1.35x1.45 smd: 1(-1,1.325)
  rect 1.35x1.45 smd: 2(-1,-1.325) 3(1,-1.325) 4(1,1.325)
  silkscreen extent -1.75,-2.05 1.73,2.12
DB9/M [mil]
  rect 70x70 hole 40: 1(218,0)
  round 70 hole 40: 2(109,0) 3(0,0) 4(-109,0) 5(-218,0) 6(163,100) 7(54,100) 8(-55,100) 9(-164,100)
  round 150 hole 130: 10(-493,50) 11(493,50)
  silkscreen extent -618,-75 618,661
DIODE-SK34A [mil]
  rect 100x80 smd: 1(0,0) 2(200,0)
  silkscreen extent -10,-60 210,60
FPC54 [mil]
  oval 9x60 smd: 1(529.54,124.02) 2(509.85,124.02) 3(490.17,124.02) 4(470.48,124.02) 5(450.8,124.02) 6(431.11,124.02) 7(411.43,124.02) 8(391.74,124.02) 9(372.06,124.02) 10(352.37,124.02) 11(332.69,124.02) 12(313,124.02) 13(293.32,124.02) 14(273.63,124.02) 15(253.95,124.02) 16(234.26,124.02) 17(214.58,124.02) 18(194.89,124.02) 19(175.21,124.02) 20(155.52,124.02) 21(135.84,124.02) 22(116.15,124.02) 23(96.47,124.02) 24(76.78,124.02) 25(57.1,124.02) 26(37.41,124.02) 27(17.73,124.02) 28(-1.96,124.02) 29(-21.64,124.02) 30(-41.33,124.02) 31(-61.01,124.02) 32(-80.7,124.02) 33(-100.38,124.02) 34(-120.07,124.02) 35(-139.75,124.02) 36(-159.44,124.02) 37(-179.12,124.02) 38(-198.81,124.02) 39(-218.49,124.02) 40(-238.18,124.02) 41(-257.86,124.02) 42(-277.55,124.02) 43(-297.23,124.02) 44(-316.92,124.02) 45(-336.6,124.02) 46(-356.29,124.02) 47(-375.97,124.02) 48(-395.66,124.02) 49(-415.34,124.02) 50(-435.03,124.02) 51(-454.71,124.02) 52(-474.4,124.02) 53(-494.08,124.02) 54(-513.77,124.02)
  rect 118.11x118.11 smd: 55(637.41,9.33) 56(-635.42,9.33)
  silkscreen extent -630,-116 630,218
HX2.54_2P [mm]
  round 1.3 hole 0.8: 1(-1.27,0) 2(1.27,0)
  silkscreen extent -3.79,-3.35 3.79,2.35, body extent -3.79,-3.35 3.79,2.35, height 7
IDC10S [mm]
  oval 1.1x1.3 hole 0.8: 1(0,0) 2(0,2) 3(2,0) 4(2,2) 5(4,0) 6(4,2) 7(6,0) 8(6,2) 9(8,0) 10(8,2)
  silkscreen extent -4.75,-3.76 12.75,3.5
IDC20S [mm]
  oval 1.1x1.3 hole 0.8: 1(0.01,-0.025) 2(0.01,1.975) 3(2.01,-0.025) 4(2.01,1.975) 5(4.01,-0.025) 6(4.01,1.975) 7(6.01,-0.025) 8(6.01,1.975) 9(8.01,-0.025) 10(8.01,1.975) 11(10.01,-0.025) 12(10.01,1.975) 13(12.01,-0.025) 14(12.01,1.975) 15(14.01,-0.025) 16(14.01,1.975) 17(16.01,-0.025) 18(16.01,1.975) 19(18.01,-0.025) 20(18.01,1.975)
  silkscreen extent -4.74,-3.78 22.76,3.47
IDC40S [mm] "ICD-2.0mm-40PIN"
  oval 1.1x1.3 hole 0.8: 1(0,0) 2(0,2) 3(2,0) 4(2,2) 5(4,0) 6(4,2) 7(6,0) 8(6,2) 9(8,0) 10(8,2) 11(10,0) 12(10,2) 13(12,0) 14(12,2) 15(14,0) 16(14,2) 17(16,0) 18(16,2) 19(18,0) 20(18,2) 21(20,0) 22(20,2) 23(22,0) 24(22,2) 25(24,0) 26(24,2) 27(26,0) 28(26,2) 29(28,0) 30(28,2) 31(30,0) 32(30,2) 33(32,0) 34(32,2) 35(34,0) 36(34,2) 37(36,0) 38(36,2) 39(38,0) 40(38,2)
  silkscreen extent -4.75,-3.76 42.8,3.5
JACK-2.5MM_B [mm]
  oval 4.445x2.032 hole 1 slot 3 at 0 deg: 1(0,0) 2(0,6.35)
  oval 2.032x4.445 hole 1 slot 3 at 90 deg: 3(-4.445,3.175)
  silkscreen extent -4.42,0 4.47,14.48, body extent -4.83,-0.25 4.83,14.73, height 10
L0603_M1608 [mm]
  rect 0.95x0.9 smd: 1(-0.775,0) 2(0.775,0)
  silkscreen extent -1.48,-0.65 1.48,0.65, body extent -0.85,-0.45 0.85,0.45, height 0.55
L0805 [mm] "Chip Inductor, 2-Leads, Body 2.0x1.2mm, IPC Medium Density"
  rect 0.95x1.3 smd: 1(-1.025,0) 2(1.025,0)
  silkscreen extent -0.2,-0.56 0.2,0.56, body extent -1,-0.6 1,0.6, height 1.27
LED0603_M1608 [mm] "Molded Diode, 2-Leads, Body 1.9x0.8mm, IPC Medium Density"
  rect 1.1x0.95 smd: 1(-0.85,0) 2(0.85,0)
  silkscreen extent 1.68,-0.45 1.68,0.45, body extent -1,-0.5 1,0.5, height 0.9
LM1117 [mm] "SOT223"
  rect 1x2.4 smd: 1(2.2,-3) 2(-0.1,-3) 3(-2.4,-3)
  rect 3.3x2.4 smd: 4(-0.1,2.8)
  silkscreen extent -3.45,-1.4 3.25,1.2, body extent -3.45,-1.95 3.25,1.75, height 1.8
MARK [mm]
  round 1 smd mask+1: 0(0,0)
  Top Layer circle w0: c0,0 r1.4
MiniUSB [mil]
  rect 120x20 smd: 1(-0.2,-62.99) 2(0,-31.5) 3(0,0) 4(0,31.5) 5(0,62.99)
  rect 100x80 smd: 6(48.04,-175.98) 7(48.04,174.02) 8(252.77,-174.21) 9(252.77,176.18)
  round 0 hole 37 unplated: ""(146.47,-87.6) ""(146.47,85.63)
  silkscreen extent 17,-153 379,151
POWER_switch [mm]
  rect 2x1.5 hole 1.2 slot 1.7 at 0 deg: 1(0,-4.7) 2(0,0) 3(0,4.7)
  rect 2.2x1 hole 0.7 slot 1.9 at 0 deg: ""(9.7,-6.6) ""(9.7,6.6)
  silkscreen extent 3.75,-5.75 11,5.75
QFN36(USB251x) [mm]
  oval 1.15x0.25 smd: 1(-3.025,2) 2(-3.025,1.5) 3(-3.025,1) 4(-3.025,0.5) 5(-3.025,0) 6(-3.025,-0.5) 7(-3.025,-1) 8(-3.025,-1.5) 9(-3.025,-2) 19(3.025,-2) 20(3.025,-1.5) 21(3.025,-1) 22(3.025,-0.5) 23(3.025,0) 24(3.025,0.5) 25(3.025,1) 26(3.025,1.5) 27(3.025,2)
  oval 0.25x1.15 smd: 10(-2,-3.025) 11(-1.5,-3.025) 12(-1,-3.025) 13(-0.5,-3.025) 14(0,-3.025) 15(0.5,-3.025) 16(1,-3.025) 17(1.5,-3.025) 18(2,-3.025) 28(2,3.025) 29(1.5,3.025) 30(1,3.025) 31(0.5,3.025) 32(0,3.025) 33(-0.5,3.025) 34(-1,3.025) 35(-1.5,3.025) 36(-2,3.025)
  rect 3.7x3.7 smd: 37(0,0)
  silkscreen extent -4.2,-3.1 3.1,3.1, body extent -3.08,-3.08 3.08,3.08, height 1
QFN48(TLV320) [mm]
  rect 4.8x4.8 smd: 0(0,0)
  rect 1.1x0.25 smd: 1(-3.6,2.75)
  oval 1.1x0.25 smd: 2(-3.6,2.25) 3(-3.6,1.75) 4(-3.6,1.25) 5(-3.6,0.75) 6(-3.6,0.25) 7(-3.6,-0.25) 8(-3.6,-0.75) 9(-3.6,-1.25) 10(-3.6,-1.75) 11(-3.6,-2.25) 12(-3.6,-2.75) 25(3.6,-2.75) 26(3.6,-2.25) 27(3.6,-1.75) 28(3.6,-1.25) 29(3.6,-0.75) 30(3.6,-0.25) 31(3.6,0.25) 32(3.6,0.75) 33(3.6,1.25) 34(3.6,1.75) 35(3.6,2.25) 36(3.6,2.75)
  oval 0.25x1.1 smd: 13(-2.75,-3.65) 14(-2.25,-3.65) 15(-1.75,-3.65) 16(-1.25,-3.65) 17(-0.75,-3.65) 18(-0.25,-3.65) 19(0.25,-3.65) 20(0.75,-3.65) 21(1.25,-3.65) 22(1.75,-3.65) 23(2.25,-3.65) 24(2.75,-3.65) 37(2.75,3.6) 38(2.25,3.6) 39(1.75,3.6) 40(1.25,3.6) 41(0.75,3.6) 42(0.25,3.6) 43(-0.25,3.6) 44(-0.75,3.6) 45(-1.25,3.6) 46(-1.75,3.6) 47(-2.25,3.6) 48(-2.75,3.6)
  silkscreen extent -4.72,-4.3 4.3,4.3, body extent -3.42,-3.42 3.43,3.43, height 1
QFN48C40P600X600_AR8031 [mm] "QFN, 48-Leads, Body 5.8x5.8mm (max), Pitch 0.40mm, IPC Medium Density"
  oval 1.05x0.2 smd: 1(-3.101,2.2) 2(-3.101,1.8) 3(-3.101,1.4) 4(-3.101,1) 5(-3.101,0.6) 6(-3.101,0.2) 7(-3.101,-0.2) 8(-3.101,-0.6) 9(-3.101,-1) 10(-3.101,-1.4) 11(-3.101,-1.8) 12(-3.101,-2.2) 25(3.101,-2.2) 26(3.101,-1.8) 27(3.101,-1.4) 28(3.101,-1) 29(3.101,-0.6) 30(3.101,-0.2) 31(3.101,0.2) 32(3.101,0.6) 33(3.101,1) 34(3.101,1.4) 35(3.101,1.8) 36(3.101,2.2)
  oval 0.2x1.05 smd: 13(-2.2,-3.101) 14(-1.8,-3.101) 15(-1.4,-3.101) 16(-1,-3.101) 17(-0.6,-3.101) 18(-0.2,-3.101) 19(0.2,-3.101) 20(0.6,-3.101) 21(1,-3.101) 22(1.4,-3.101) 23(1.8,-3.101) 24(2.2,-3.101) 37(2.21,3.099) 38(1.81,3.099) 39(1.41,3.099) 40(1.01,3.099) 41(0.61,3.099) 42(0.21,3.099) 43(-0.19,3.099) 44(-0.59,3.099) 45(-0.99,3.099) 46(-1.39,3.099) 47(-1.79,3.099) 48(-2.19,3.099)
  rect 3x3 smd: 49(0,0)
  Top Layer region: 2,2 2,-2 -2,-2 -2,1.7 -1.7,2
  silkscreen extent -4.39,-2.95 2.95,2.95, body extent -2.93,-2.93 2.93,2.93, height 0.9
R0603-8P4R [mm]
  rect 0.65x0.8 smd: 1(-1.275,-0.65) 4(1.275,-0.65) 5(1.275,0.65) 8(-1.275,0.65)
  rect 0.5x0.8 smd: 2(-0.4,-0.65) 3(0.4,-0.65) 6(0.4,0.65) 7(-0.4,0.65)
  silkscreen extent -1.81,-1.23 1.8,1.26
R0603_M1608 [mm] "Chip Capacitor, 2-Leads, Body 1.6x0.8mm, IPC Medium Density"
  rect 0.95x0.9 smd: 1(-0.775,0) 2(0.775,0)
  silkscreen extent -1.48,-0.65 1.48,0.65, body extent -0.85,-0.45 0.85,0.45, height 0.55
R_1210 [mm]
  rect 1.2x2.8 smd: 1(-1.6,0) 2(1.6,0)
  silkscreen extent -2.4,-1.6 2.4,1.6
RG45_Gagabit [mm]
  round 1.5 hole 1: 1(-2.53,-6.35) 2(0,-5.08) 3(-2.53,-3.81) 4(0,-2.54) 5(-2.53,-1.27) 6(0,0) 7(-2.53,1.27) 8(0,2.54) 9(-2.53,3.81) 10(0,5.08)
  round 1.5 hole 1.1: D1(8.89,-7.27) D2(10.92,-7.27) D3(8.89,6.29) D4(10.92,6.29)
  round 0 hole 3.25 unplated paste+0 mask+0: M1(6.35,-6.19) M2(6.35,5.24)
  round 2.2 hole 1.8: SHLD1(3.35,-8.22) SHLD2(3.35,7.28)
  silkscreen extent -4.49,-9.57 16.86,8.67
SDcard_KDMS18 [mm]
  rect 1.15x2.55 smd: 1(19.916,0) 2(17.426,0) 3(13.87,0) 4(12.346,0) 5(9.806,0) 6(7.266,0) 7(4.876,-0.001) 8(3.202,0) 9(22.306,0) 10(0,0) 11(15.902,0)
  round 0 hole 1.7: 3(0.891,-24.968) 3(25.021,-24.968)
  rect 2x2.2 smd: 12(-1.237,-22.809) 13(27.719,-21.92)
  silkscreen extent -1.22,-31.32 27.73,-1.48
SMB/DO-214AA [mm]
  rect 2.45x2.05 smd: 1(2.2,0) 2(-2.2,0)
  silkscreen extent -3.13,-2 2.35,2
"SO8_N - ADUM1201" [mm] "SOIC, 8-Leads, Body 4.9x3.9mm, Pitch 1.27mm, IPC Medium Density"
  rect 1.8x0.6 smd: 1(-3.162,1.905)
  oval 1.8x0.6 smd: 2(-3.162,0.635) 3(-3.162,-0.635) 4(-3.162,-1.905) 5(3.162,-1.905) 6(3.162,-0.635) 7(3.162,0.635) 8(3.162,1.905)
  silkscreen extent -1.77,-2.5 1.79,2.5
SOD123 [mm]
  rect 1x0.5 smd: 1(1.5,0) 2(-1.5,0)
  silkscreen extent -1.33,-0.8 1.33,0.8
SOIC-8N [mm]
  rect 2.2x0.6 smd: 1(-2.9,1.905)
  oval 2.2x0.6 smd: 2(-2.9,0.635) 3(-2.9,-0.635) 4(-2.9,-1.905) 5(2.9,-1.905) 6(2.9,-0.635) 7(2.9,0.635) 8(2.9,1.905)
  silkscreen extent -2.78,-2.5 1.4,2.88, body extent -1.99,-2.5 1.99,2.5, height 1.75
SOIC-16N [mil]
  oval 80x24 smd: 1(-110.24,173.23) 2(-110.24,123.23) 3(-110.24,73.23) 4(-110.24,23.23) 5(-110.24,-26.77) 6(-110.24,-76.77) 7(-110.24,-126.77) 8(-110.24,-176.77) 9(109.76,-176.77) 10(109.76,-126.77) 11(109.76,-76.77) 12(109.76,-26.77) 13(109.76,23.23) 14(109.76,73.23) 15(109.76,123.23) 16(109.76,173.23)
  silkscreen extent -116,-202 50,229
"SOP-8 - RX8010SJ" [mm]
  rect 2x0.6 smd: 1(-3.024,1.905)
  oval 2x0.6 smd: 2(-3.024,0.635) 3(-3.024,-0.635) 4(-3.024,-1.905) 5(3.024,-1.905) 6(3.024,-0.635) 7(3.024,0.635) 8(3.024,1.905)
  silkscreen extent -3.01,-3.5 1.91,3.64
SOT23 [mil]
  rect 47.24x36 smd: 1(-40,37.5) 2(-40,-37.5)
  rect 51.18x36 smd: 3(40,-0.5)
  silkscreen extent -38,-58 45,68
SOT23-3D-C95P280X100 [mm] "SOT23, 3-Leads, Body 3.0x2.9mm (max), Pitch 0.95mm, IPC Medium Density"
  rect 1.4x0.6 smd: 1(-1.15,0.95) 2(-1.15,-0.95) 3(1.15,0)
  silkscreen extent -1.27,-1.5 0.8,1.92, body extent -0.8,-1.5 0.8,1.5, height 1
SOT-523 [mm] "SOT23, 3-Leads, Body 1.7x1.8mm (max), Pitch 0.50mm, IPC Medium Density"
  rect 0.85x0.4 smd: 1(-0.825,0.5) 2(-0.825,-0.5) 3(0.825,0)
  silkscreen extent -0.95,-0.85 0.43,1.37, body extent -0.43,-0.85 0.43,0.85, height 0.9
SWITCH_1P [mm]
  round 1.6 hole 0.7: 1(0,-3.8) 2(0,3.8)
  silkscreen extent -2.1,-5 2.1,5
SWPB-4 [mm]
  rect 0.7x1.5 smd: 1(-1.651,-3.429) 2(-1.651,3.556) 3(1.397,-3.429) 4(1.397,3.556)
  silkscreen extent -2.54,-2.29 2.29,2.41
TC3216A [mm]
  rect 2x1.2 smd: 1(-1.4,0) 2(1.4,0)
  silkscreen extent -2.42,-0.9 1.7,1.28
USB-C [mm]
  round 2.25 hole 1.35: 0(-0.889,2.794) 0(-0.889,-2.667) 0(6.096,-2.667) 0(6.096,2.794)
  rect 1.7x1.7 hole 1: 1(5.842,0)
  round 1.7 hole 1: 2(3.81,0) 3(1.778,0) 4(-0.254,0)
  silkscreen extent -1.27,-2.67 18.03,2.79
Y7050 [mm]
  rect 1x2 smd: 1(2.53,2.455)
  oval 1x2 smd: 2(-2.55,2.455) 3(-2.55,-2.625) 4(2.53,-2.625)
  silkscreen extent -3.61,-2.69 3.59,4.75

## Part data
BT1: library part Battery
C1 C2 C36 C48 C67 C71 C79 C80 C82: library part Cap, "Capacitor"
C3 C4 C5 C6 C7 C8 C9 C10 C11 C12 C14 C15 C16 C17 C18 C19 C20 C21 C22 C23 C24 C25 C26 C27 C28 C29 C30 C31 C32 C33 C49 C50 C51 C52 C53 C54 C55 C56 C57 C58 C59 C60 C61 C62 C63 C64 C65 C66 C68 C69 C70 C72 C73 C74 C75 C76 C77 C78 C83 C84 C85: library part CAP_1
C13 C81: "Polarized Capacitor (Surface Mount)"
C34 C35 C37 C38 C39 C40 C41 C42 C43 C44 C45 C46 C47: library part CAP, "Capacitor"
D3: "SOT23-3_D"
D5: library part "Diode 11DQ03", "Schottky Rectifier"
D6: library part DIODE_ZENER
D10 D11 D12 D13: library part "Diode 1N4148", "High Conductance Fast Diode"
F1: "Fuse"
J6 J7 J8 J17: library part USB_B
J10 J11: "Receptacle Assembly, 9 Position, Right Angle"
J15: library part FPC54
L5: library part Inductance, "10X10_smd_5%"
L6 L7: library part BEADS, "BEADS"
L8 L14: library part BEADS, "0603"
LED1 LED2 LED4 LED5 LED6 LED7: library part LED2, "Typical RED, GREEN, YELLOW, AMBER GaAs LED"
MARK1 MARK2 MARK3 MARK4: library part Antenna, "Generic Antenna"
P1 P8: library part "Header 10X2", "Header, 10-Pin, Dual row"
P2 P3 P4 P6: library part "Header 5X2", "Header, 5-Pin, Dual row"
P5 P7 P10: library part "Header 2", "Header, 2-Pin"
P9: library part "Header 20X2", "Header, 20-Pin, Dual row"
Q1 Q3 Q5 Q6 Q9 Q10: library part AO3415
Q2: library part PNP_S
Q4 Q7 Q8: library part S9013
R1 R7 R28 R34 R39 R49 R50 R51 R64 R65 R66 R67 R68 R69 R70 R71 R72 R73 R74 R75 R76 R77 R78 R79 R80 R81 R84 R85 R86 R87 R88 R89 R90 R91 R92 R93 R94 R95 R105 R112 R113 R127 R128 R129 R130 R131 R132 R133 R142 R143 R147 R148 R149 R150 R153 R156 R157 R260 R261: library part Res1, "Resistor"
R2 R9 R10 R11 R12 R43 R44 R46 R60 R120: library part 8P4R
R3 R4 R5 R6 R8 R13 R14 R17 R18 R19 R20 R21 R22 R23 R24 R25 R26 R27 R29 R30 R31 R32 R35 R36 R37 R38 R40 R41 R42 R45 R48 R52 R53 R54 R55 R56 R57 R59 R61 R62 R82 R83 R96 R97 R98 R99 R100 R101 R102 R103 R106 R107 R108 R109 R110 R111 R114 R116 R117 R118 R119 R124 R125 R126 R135 R136 R137 R138 R140 R141: library part Res1, "R0603"
R15 R16 R33 R47 R58: "Resistor"
S2: library part "SW DIP-1"
U4 U17: library part ADuM1201
U8: "Atheros  10/100/1000 Gigabit Ethernet"
U10: "TI SOIC16"
U11: "AUDIO ENCODE"
U13: library part MAX485, "SOIC8"
U14: "SOIC8"
X1: library part XTAL, "Crystal Oscillator"
X2 X3: library part XTAL, "X3225_20ppm"
X4: library part "12M XTAL"

## Free pads (board coordinates)
  round 5 hole 2.2: 5(11.275,33.028) 6(-13.175,-31.205)
  round 6 hole 3.3: 11(-55.725,26.45) 11(41.275,-47.55) 11(41.275,26.45) ""(-89.725,-62.525) ""(-89.725,57.475) ""(-55.725,-47.55) ""(-55.725,37.45) ""(56.275,-47.55) ""(56.275,37.45) ""(90.275,-62.525) ""(90.275,57.475)

## Via types
v1: diameter 0.6, hole 0.3, Top Layer to Bottom Layer, tented both sides, 718 vias
v2: diameter 0.66, hole 0.3, Top Layer to Bottom Layer, tented both sides, 34 vias
v3: diameter 0.6, hole 0.35, Top Layer to Bottom Layer, tented both sides, 25 vias
v4: diameter 0.45, hole 0.3, Top Layer to Bottom Layer, tented both sides, 16 vias
v5: diameter 0.4, hole 0.254, Top Layer to Bottom Layer, 4 vias
v6: diameter 0.6, hole 0.3, Top Layer to Bottom Layer, 2 vias

## Nets (pads, with @x,y where several pads share a name; then routed paths per layer and width w, separated by ;. In a path a pad name is that pad's centre, name@x,y a point inside that pad or via, vN(x,y) a via of type N, cw(c..) or ccw(c..) an arc to the next point about the centre after c; other vN are vias at no path point)
485-GND: C13.2 C48.1 D14.3 R34.1 R51.2 U3.4 U4.5 U13.5 | length 49.5
  Top Layer w0.6: v1(-79.299,-9.144) D14.3@-78.295,-9.144 ; R34.1@-77.978,-16.523 -77.353,-17.148 R51.2@-75.438,-17.148 v1(-73.609,-17.148) C13.2@-72.136,-17.148 -67.262,-17.148 -65.024,-14.91 U3.4@-65.024,-14.732 ; v1(-76.593,-4.585) C48.1@-75.438,-4.585 -75.438,-6.329 U13.5@-74.274,-7.493 ; v1(-65.684,-7.493) U4.5@-64.122,-7.493
  Bottom Layer w0.6: v1(-79.299,-9.144) -73.609,-9.144 ; v1(-76.593,-4.585) -73.609,-7.569 -73.609,-9.144 ; v1(-73.609,-17.148) -73.609,-9.144 ; v1(-65.684,-7.493) -67.335,-9.144 -73.609,-9.144
485-VDD: C13.1 C48.2 R51.1 R105.1 R112.1 R113.1 U3.5 U4.8 U13.8 | length 34.1
  Top Layer w0.4: R105.1@-77.978,-3.035 C48.2@-75.438,-3.035 -74.143,-3.035 ; R51.1@-75.438,-14.348 C13.1@-72.136,-14.348 -67.84,-14.348 -64.795,-11.303 U4.8@-64.122,-11.303 ; -74.274,-14.327 U13.8@-74.274,-11.303 -72.771,-11.303 -72.111,-10.643 -72.111,-7.366 -74.143,-5.334 -74.143,-3.035 ; R112.1@-70.358,-3.035 R113.1@-72.898,-3.035 -74.143,-3.035
AIN4: J1.71 P4.8 | length 101.8
  Top Layer w0.2: P4.8@-89.63,-47.34 -88.645,-46.355 -86.36,-46.355 -82.734,-49.981 -62.622,-49.981 -61.352,-51.251 -54.218,-51.251 -51.619,-48.652 -51.619,-25.649 -45.643,-19.672 -27.405,-19.672 -26.181,-18.448 -26.181,-13.532 -25.071,-12.422 J1.71@-22.725,-12.422
AIN5: J1.75 P4.3 | length 95.5
  Top Layer w0.2: P4.3@-87.63,-51.34 -83.852,-51.34 -82.893,-50.381 -62.788,-50.381 -61.518,-51.651 -54.052,-51.651 -51.219,-48.818 -51.219,-25.814 -45.477,-20.072 -27.24,-20.072 -25.781,-18.614 -25.781,-16.917 -23.826,-14.962 J1.75@-22.725,-14.962
AIN6: J1.79 P4.1 | length 94.3
  Top Layer w0.2: P4.1@-87.63,-53.34 -86.614,-52.324 -84.201,-52.324 -82.658,-50.781 -62.953,-50.781 -61.683,-52.051 -53.887,-52.051 -50.819,-48.983 -50.819,-25.98 -45.311,-20.472 -27.074,-20.472 -24.104,-17.502 J1.79@-22.725,-17.502
AIN7: J1.83 P4.2 | length 96.2
  Top Layer w0.2: P4.2@-89.63,-53.74 -89.63,-53.88 -88.9,-54.61 -85.852,-54.61 -82.423,-51.181 -63.119,-51.181 -61.849,-52.451 -53.721,-52.451 -50.419,-49.149 -50.419,-26.146 -45.146,-20.872 -26.908,-20.872 -26.078,-20.042 J1.83@-22.725,-20.042
BAT: J1.11 J1.12 | length 4.6
  Top Layer w0.5: J1.11@-22.725,25.678 -18.178,25.678 J1.12@-18.175,25.675
BAT_RTC: J1.23
BAT_SENSE: J1.13
BL_OUT: J1.18
CAN-GND: C81.2 C82.1 D24.3 R1.2 R118.1 U14.2 U17.5 U18.4 | length 51
  Top Layer w0.6: v1(-79.375,-27.686) D24.3@-78.295,-27.686 ; R118.1@-75.705,-30.988 -76.937,-30.988 -77.495,-31.547 -77.495,-36.601 -76.883,-37.214 R1.2@-75.438,-37.214 -73.66,-37.214 C81.2@-72.136,-37.214 -67.643,-37.214 U18.4@-65.227,-34.798 ; v1(-70.307,-29.921) -69.837,-30.391 C82.1@-69.837,-30.988 ; v1(-70.282,-27.813) U14.2@-68.474,-27.813 ; v1(-65.583,-24.587) -64.897,-25.273 U17.5@-64.122,-25.273
  Bottom Layer w0.6: v1(-79.375,-27.686) -68.682,-27.686 v1(-65.583,-24.587) ; v1(-70.282,-37.211) v1(-70.282,-27.813)
CAN-VDD: C81.1 C82.2 R1.1 R153.1 U14.3 U17.8 U18.5 | length 26.9
  Top Layer w0.4: R1.1@-75.438,-34.414 -75.054,-34.798 U18.5@-67.564,-34.798 ; C81.1@-72.136,-34.414 -72.136,-33.071 -71.476,-32.41 -66.599,-32.41 -65.507,-31.318 -65.507,-30.582 -66.192,-29.896 -66.192,-27.534 -67.183,-26.543 U14.3@-68.474,-26.543 ; -71.387,-32.322 C82.2@-71.387,-30.988 ; -66.167,-29.083 U17.8@-64.122,-29.083
D0_N: J5.2 R48.2 | length 3.5
  Top Layer w0.2: J5.2@51.775,52.655 51.775,51.028 51.56,50.813 51.56,49.824 R48.2@51.968,49.416
D0_P: J5.3 R41.2 | length 3.6
  Top Layer w0.2: R41.2@50.47,49.416 51.19,50.136 51.19,50.813 50.975,51.028 J5.3@50.975,52.655
DCAN0_RX: J1.40 R149.2 U17.2 | length 84.4
  Top Layer w0.2: U17.2@-57.798,-27.813 -54.349,-27.813 -45.808,-19.272 -27.571,-19.272 -26.581,-18.282 -26.581,-13.366 -25.012,-11.797 -21.066,-11.797 -19.8,-10.53 -14.482,-10.53 -13.582,-11.43 -12.573,-11.43 v1(-11.811,-10.668) ; J1.40@-18.175,7.895 -13.102,7.895 -7.62,2.413 v1(-7.62,-4.191)
  Bottom Layer w0.2: v1(-11.811,-10.668) -11.811,-8.382 v1(-7.62,-4.191)
DCAN0_TX: J1.38 U17.3 | length 87.8
  Top Layer w0.2: U17.3@-57.798,-26.543 -53.645,-26.543 -45.974,-18.872 -27.737,-18.872 -26.981,-18.117 -26.981,-13.201 -24.307,-10.527 -21.069,-10.527 -19.802,-9.26 -11.778,-9.26 -10.668,-10.37 v1(-10.668,-10.922) ; J1.38@-18.175,9.165 -12.975,9.165 -6.604,2.794 v1(-6.604,-4.445)
  Bottom Layer w0.2: v1(-10.668,-10.922) -10.668,-8.509 v1(-6.604,-4.445)
ETH_RESETN: C71.2 R7.1 R81.1 U8.2 | length 10.6
  Top Layer w0.2: U8.2@51.336,15.396 51.99,15.396 52.654,14.732 v1@54.026,14.732 ; v1@56.972,14.732 58.229,13.475 R7.1@58.229,10.592
  Bottom Layer w0.2: v1@54.026,14.732 v1@56.972,14.732
  other v1: 54.026,14.783 56.972,14.783
EVENT_INT0: J1.45 J15.13 | length 69.9
  Top Layer w0.2: J1.45@-22.725,4.088 v1(-20.573,4.088) ; v1(-15.342,3.505) -15.215,3.378 -13.862,3.378 -12.535,2.052 -12.535,-5.542 -8.958,-9.119 -2.87,-9.119 0.838,-12.827 0.838,-18.085 6.087,-23.334 6.087,-31.555 7.525,-32.993 J15.13@7.525,-44.925
  Bottom Layer w0.2: v1(-20.573,4.088) -15.925,4.088 v1(-15.342,3.505)
EVENT_INT1: J1.47 J15.14 | length 69.1
  Top Layer w0.2: J1.47@-22.725,2.818 v1(-20.6,2.818) ; v1(-15.037,2.565) -13.614,2.565 -12.935,1.886 -12.935,-5.707 -9.003,-9.639 -3.061,-9.639 0.356,-13.056 0.356,-18.313 5.667,-23.625 5.667,-31.729 7.025,-33.087 J15.14@7.025,-44.925
  Bottom Layer w0.2: v1(-20.6,2.818) -17.042,2.818 -16.408,2.184 -15.418,2.184 v1(-15.037,2.565)